# Altium PCB Hauptplatine.PcbDoc (part 1 of 3)
Units mm, origin at the board's own origin, x right, y up, seen from the top; angles counter-clockwise.
Board outline 110.5 x 110.5 mm, 4 copper layers (Top Layer, GND, POWER, Bottom Layer), stack 0.551 mm thick; 103 components, 92 nets, 407 pads, 378 vias.
Unrouted connection lines stored in the file: 3.
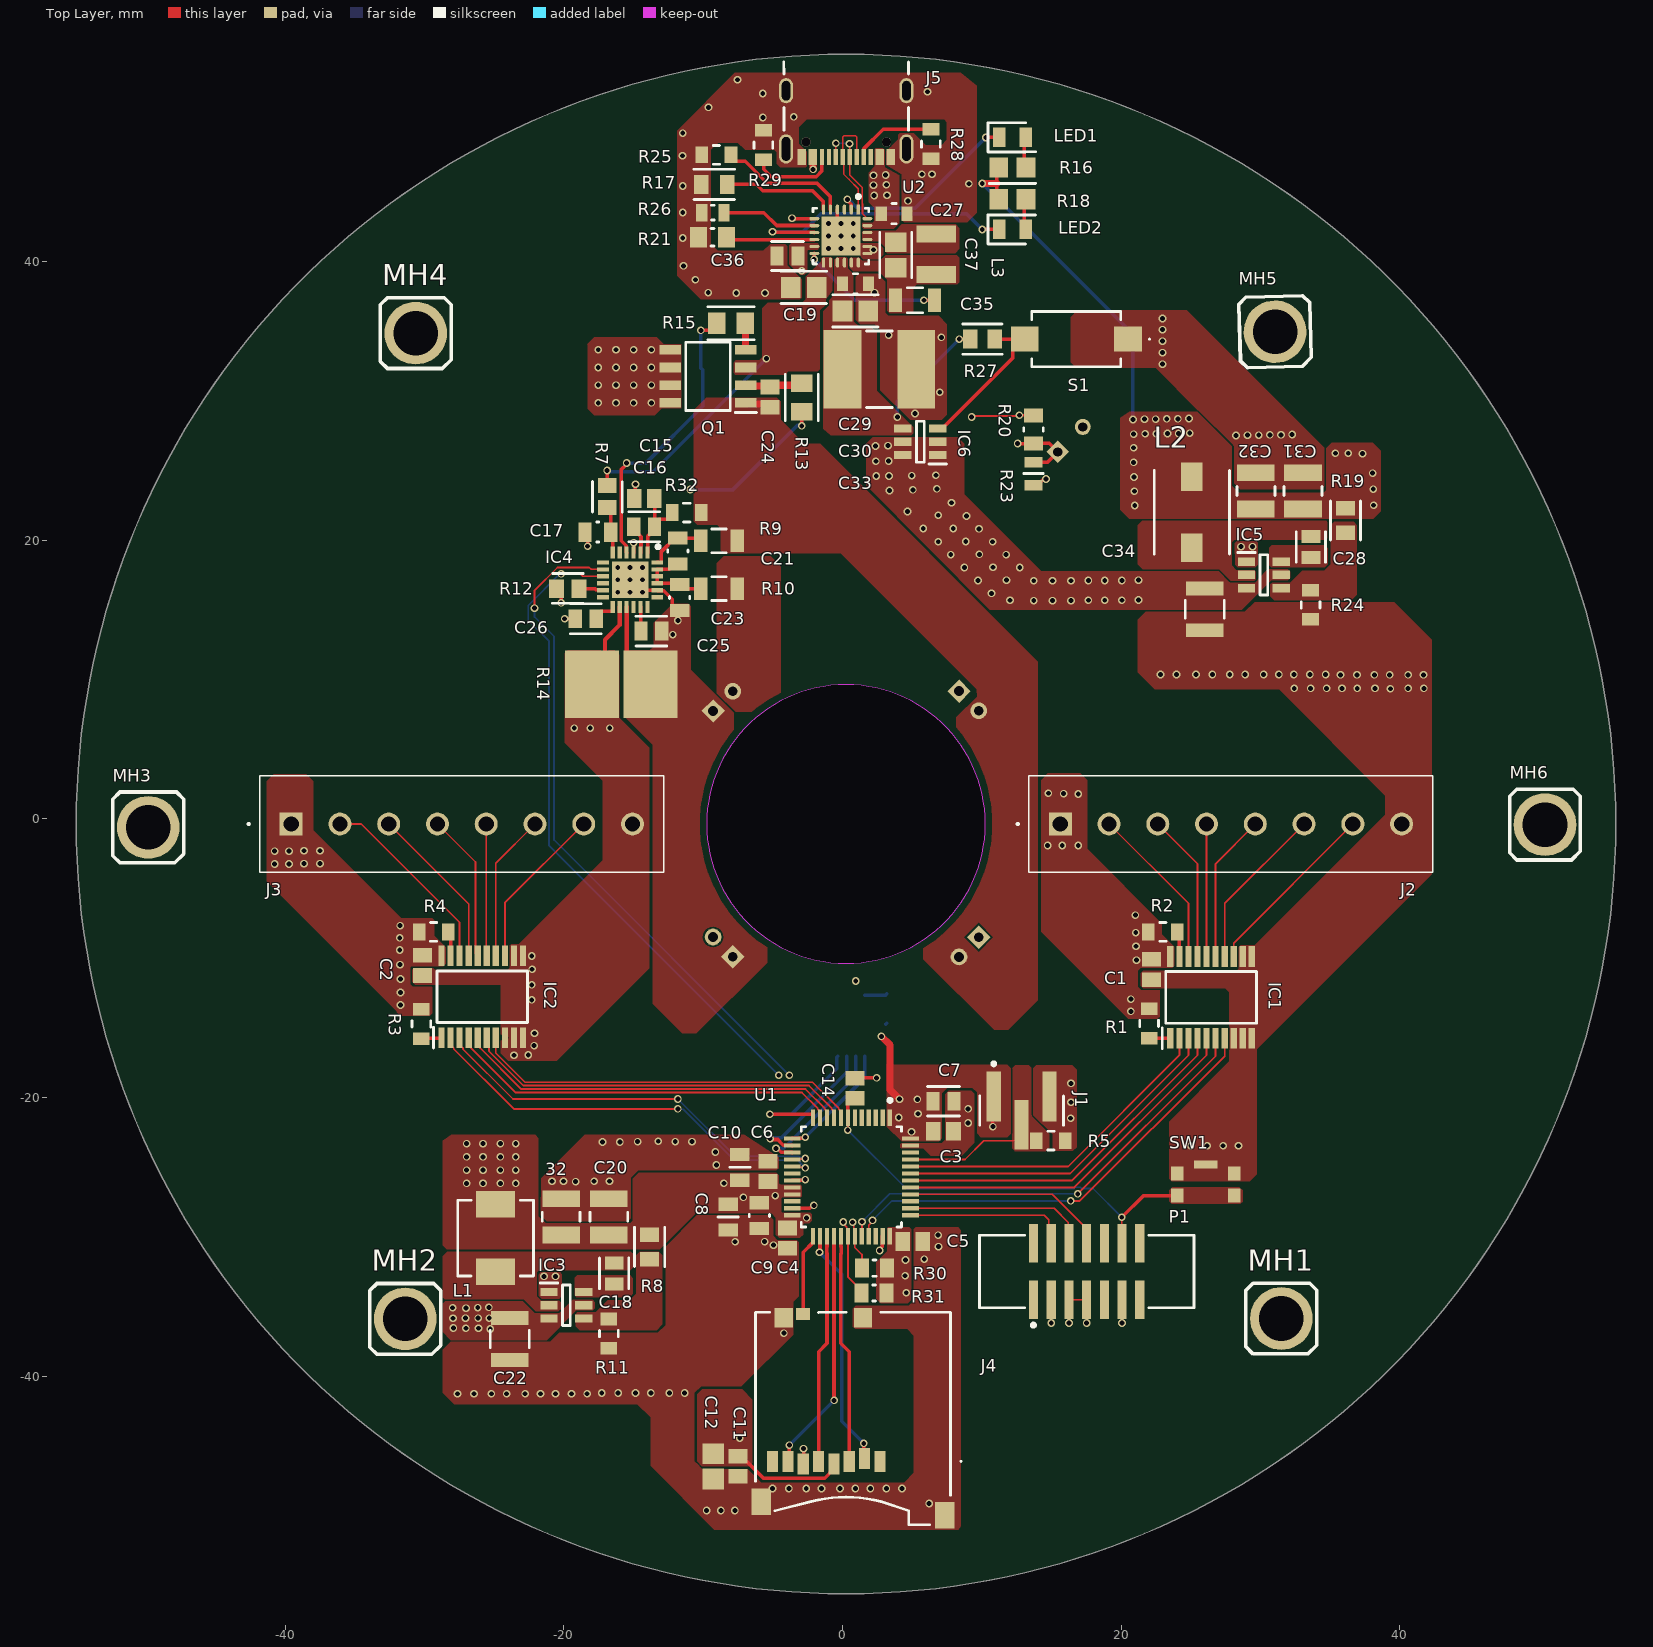
[diagram p0: Top Layer view]
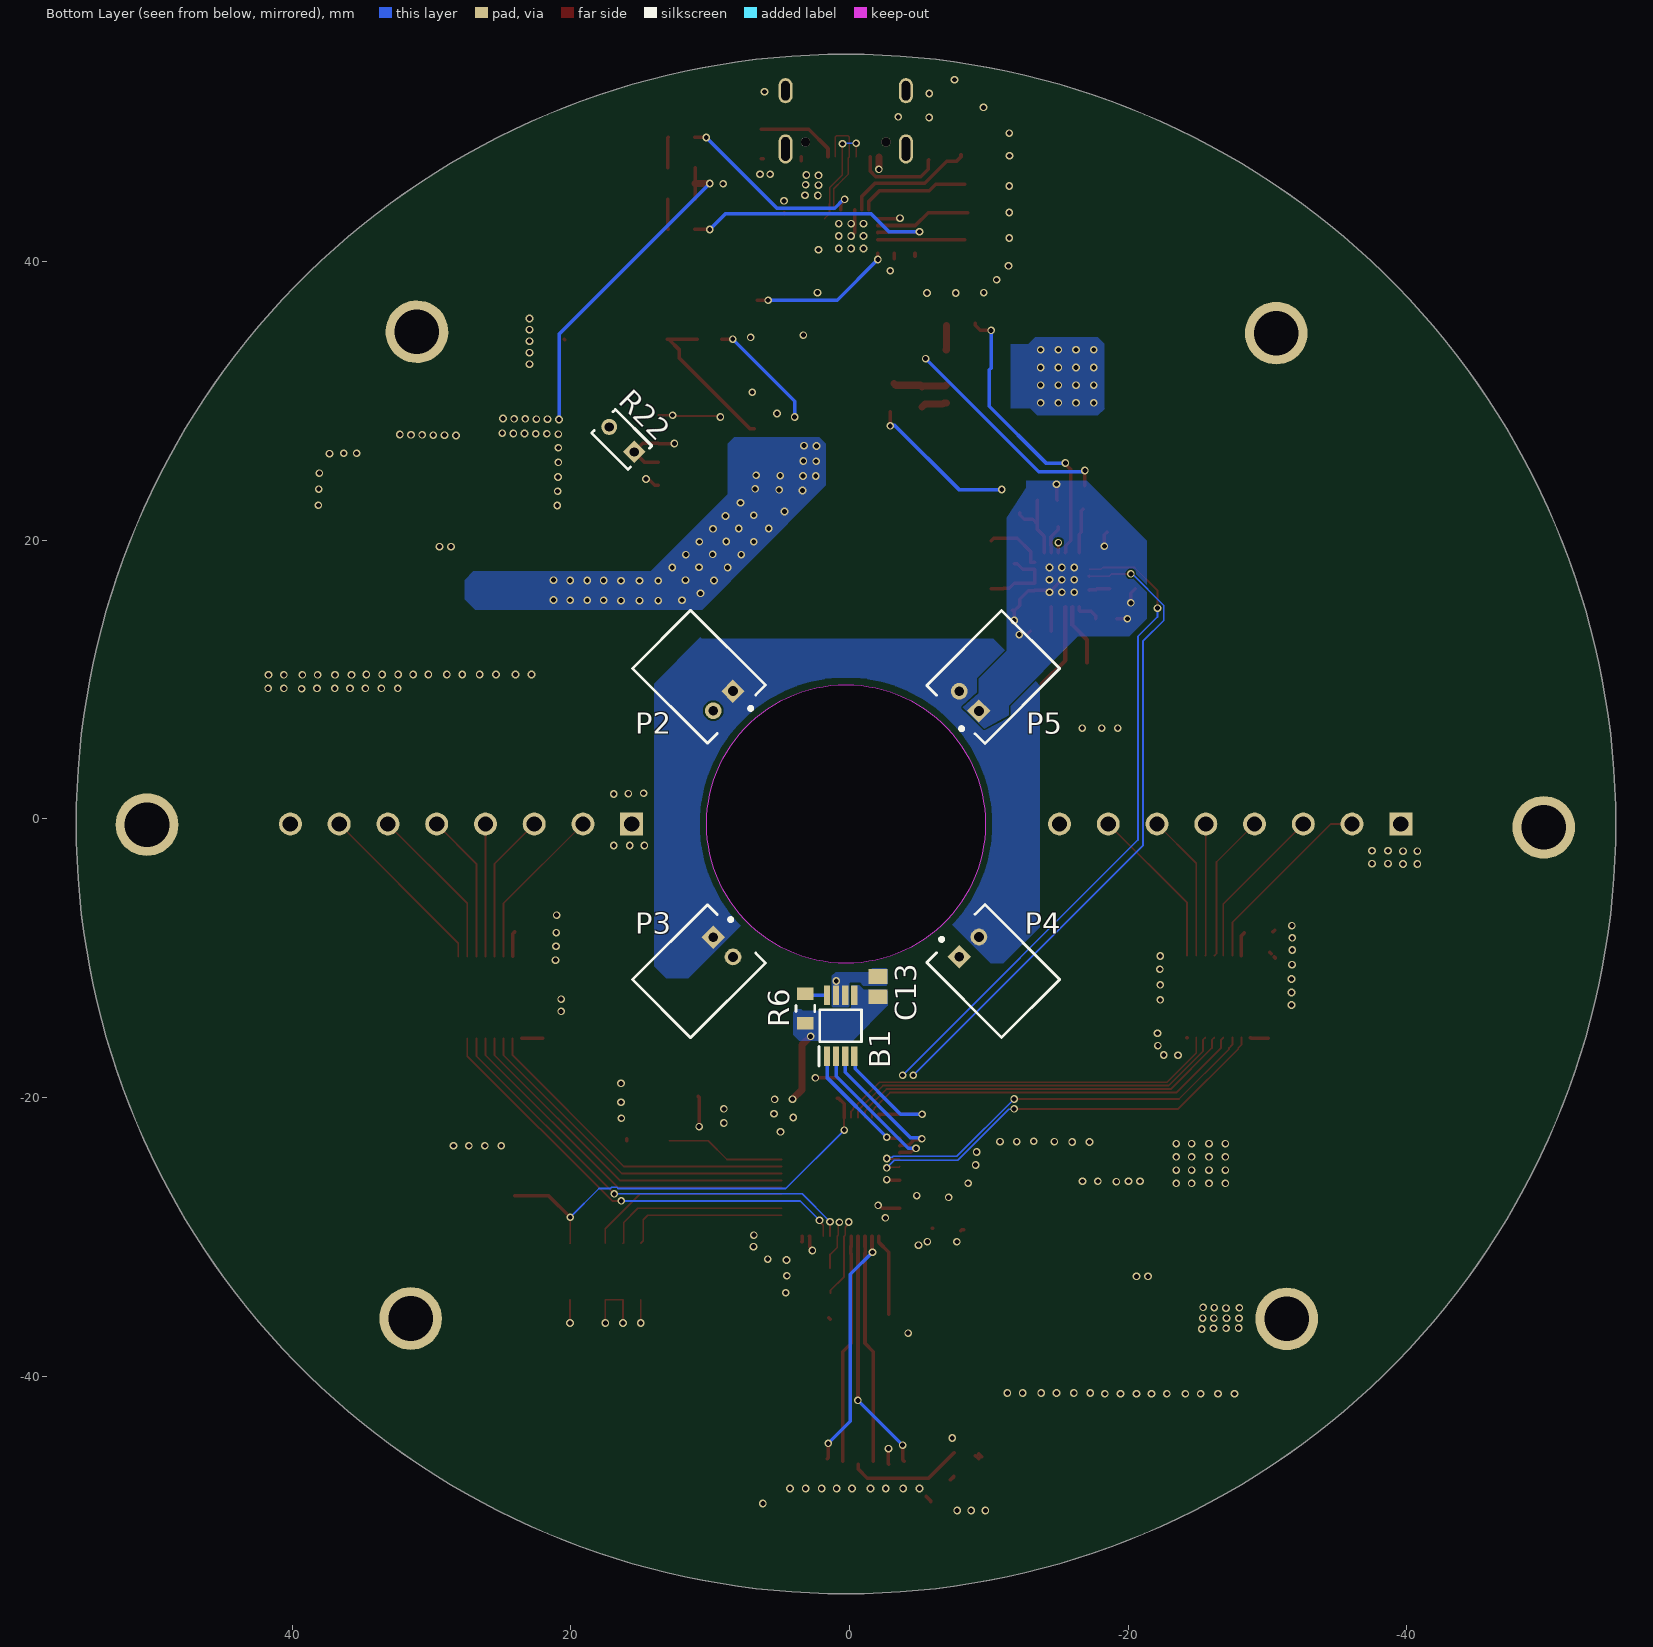
[diagram p1: Bottom Layer view, seen from below]
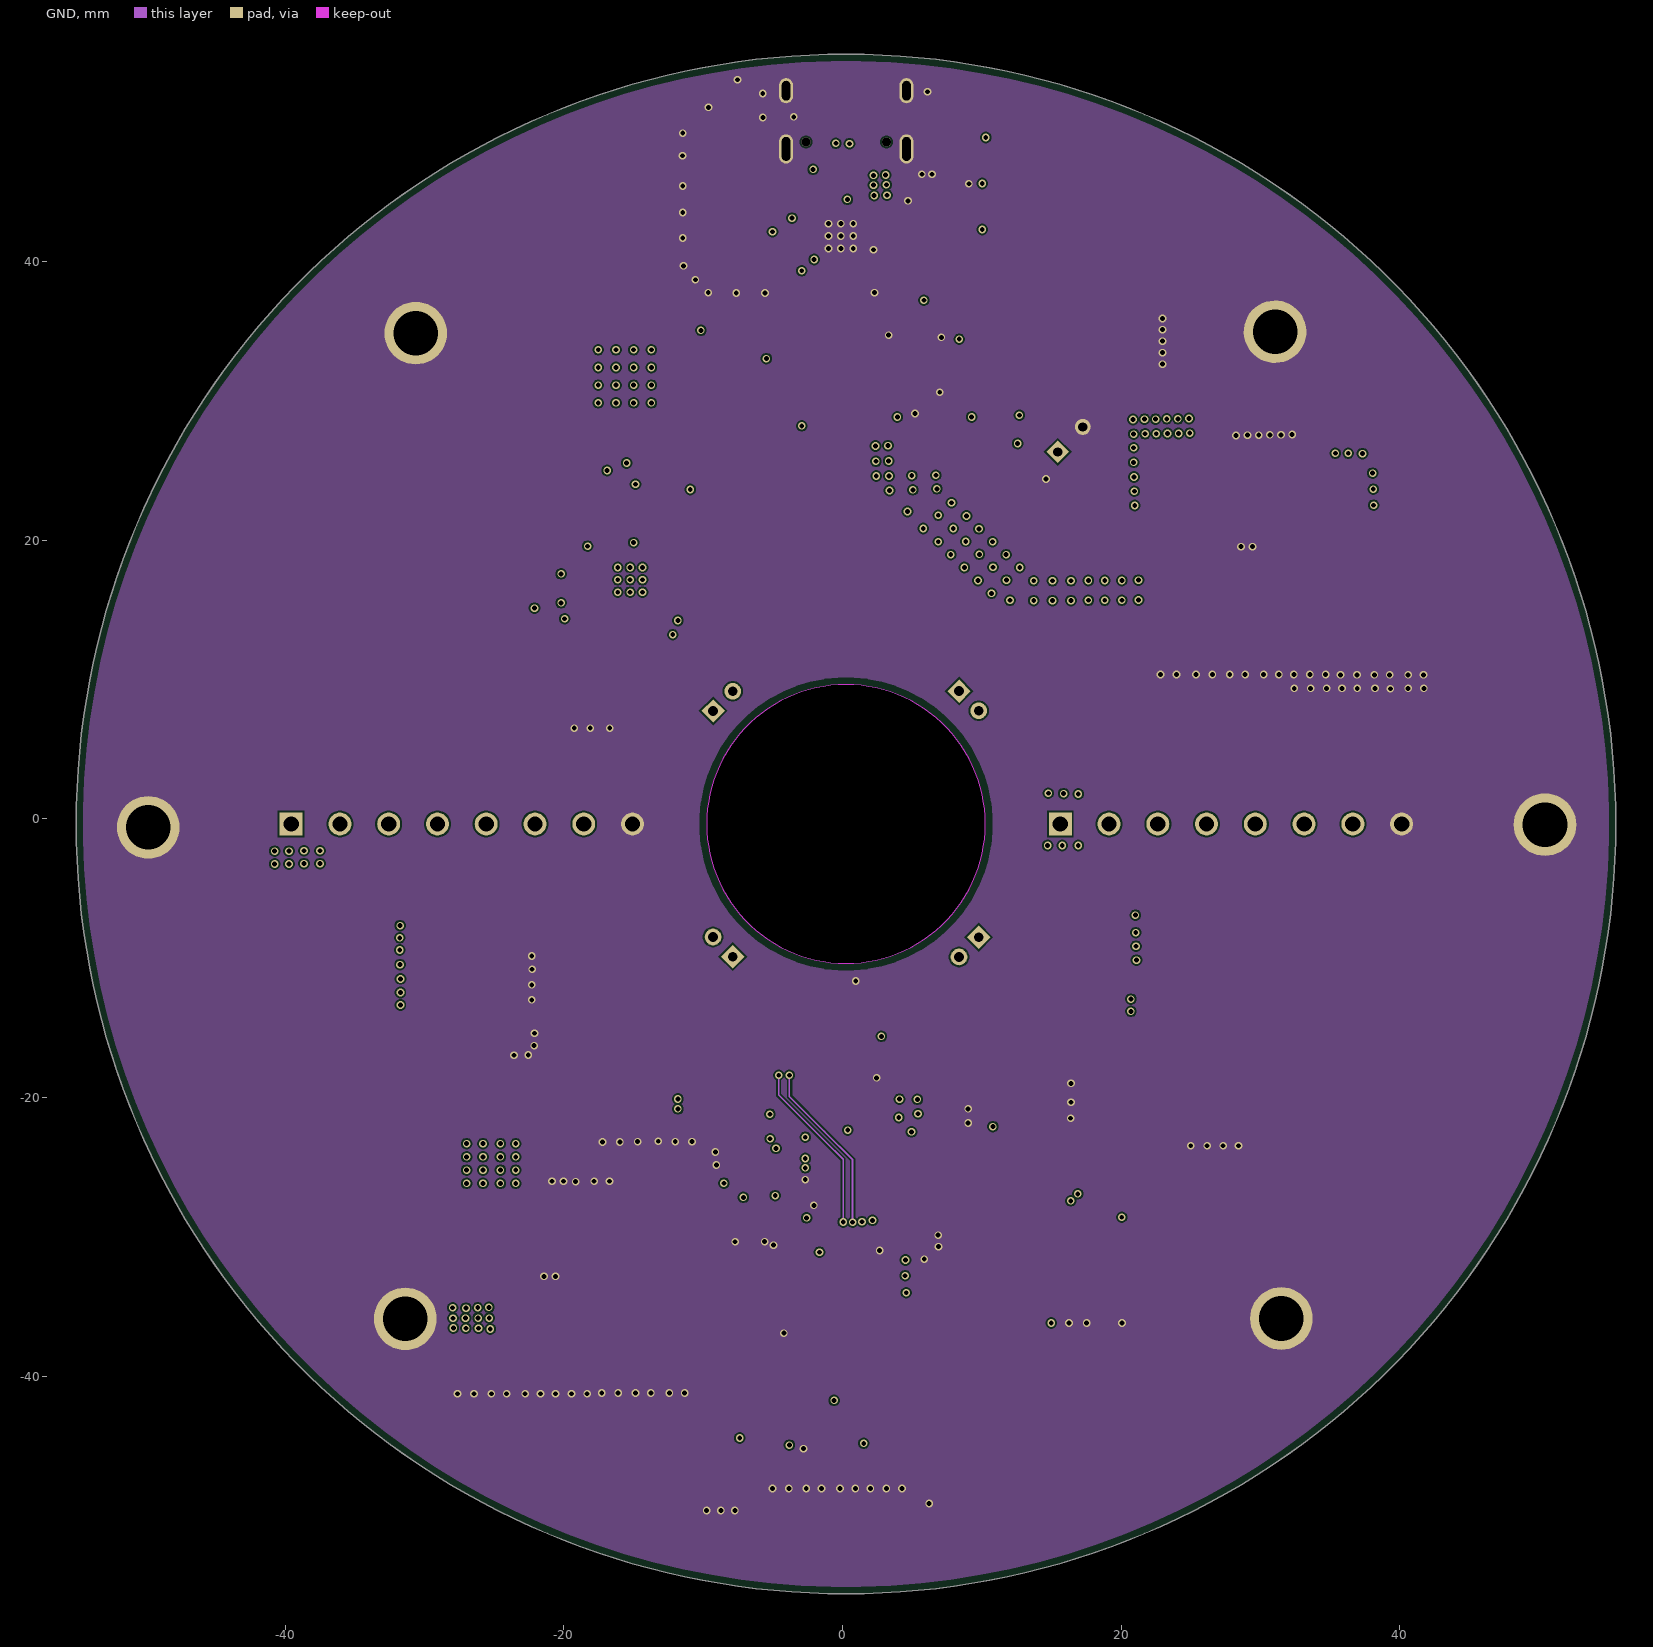
[diagram p2: GND]
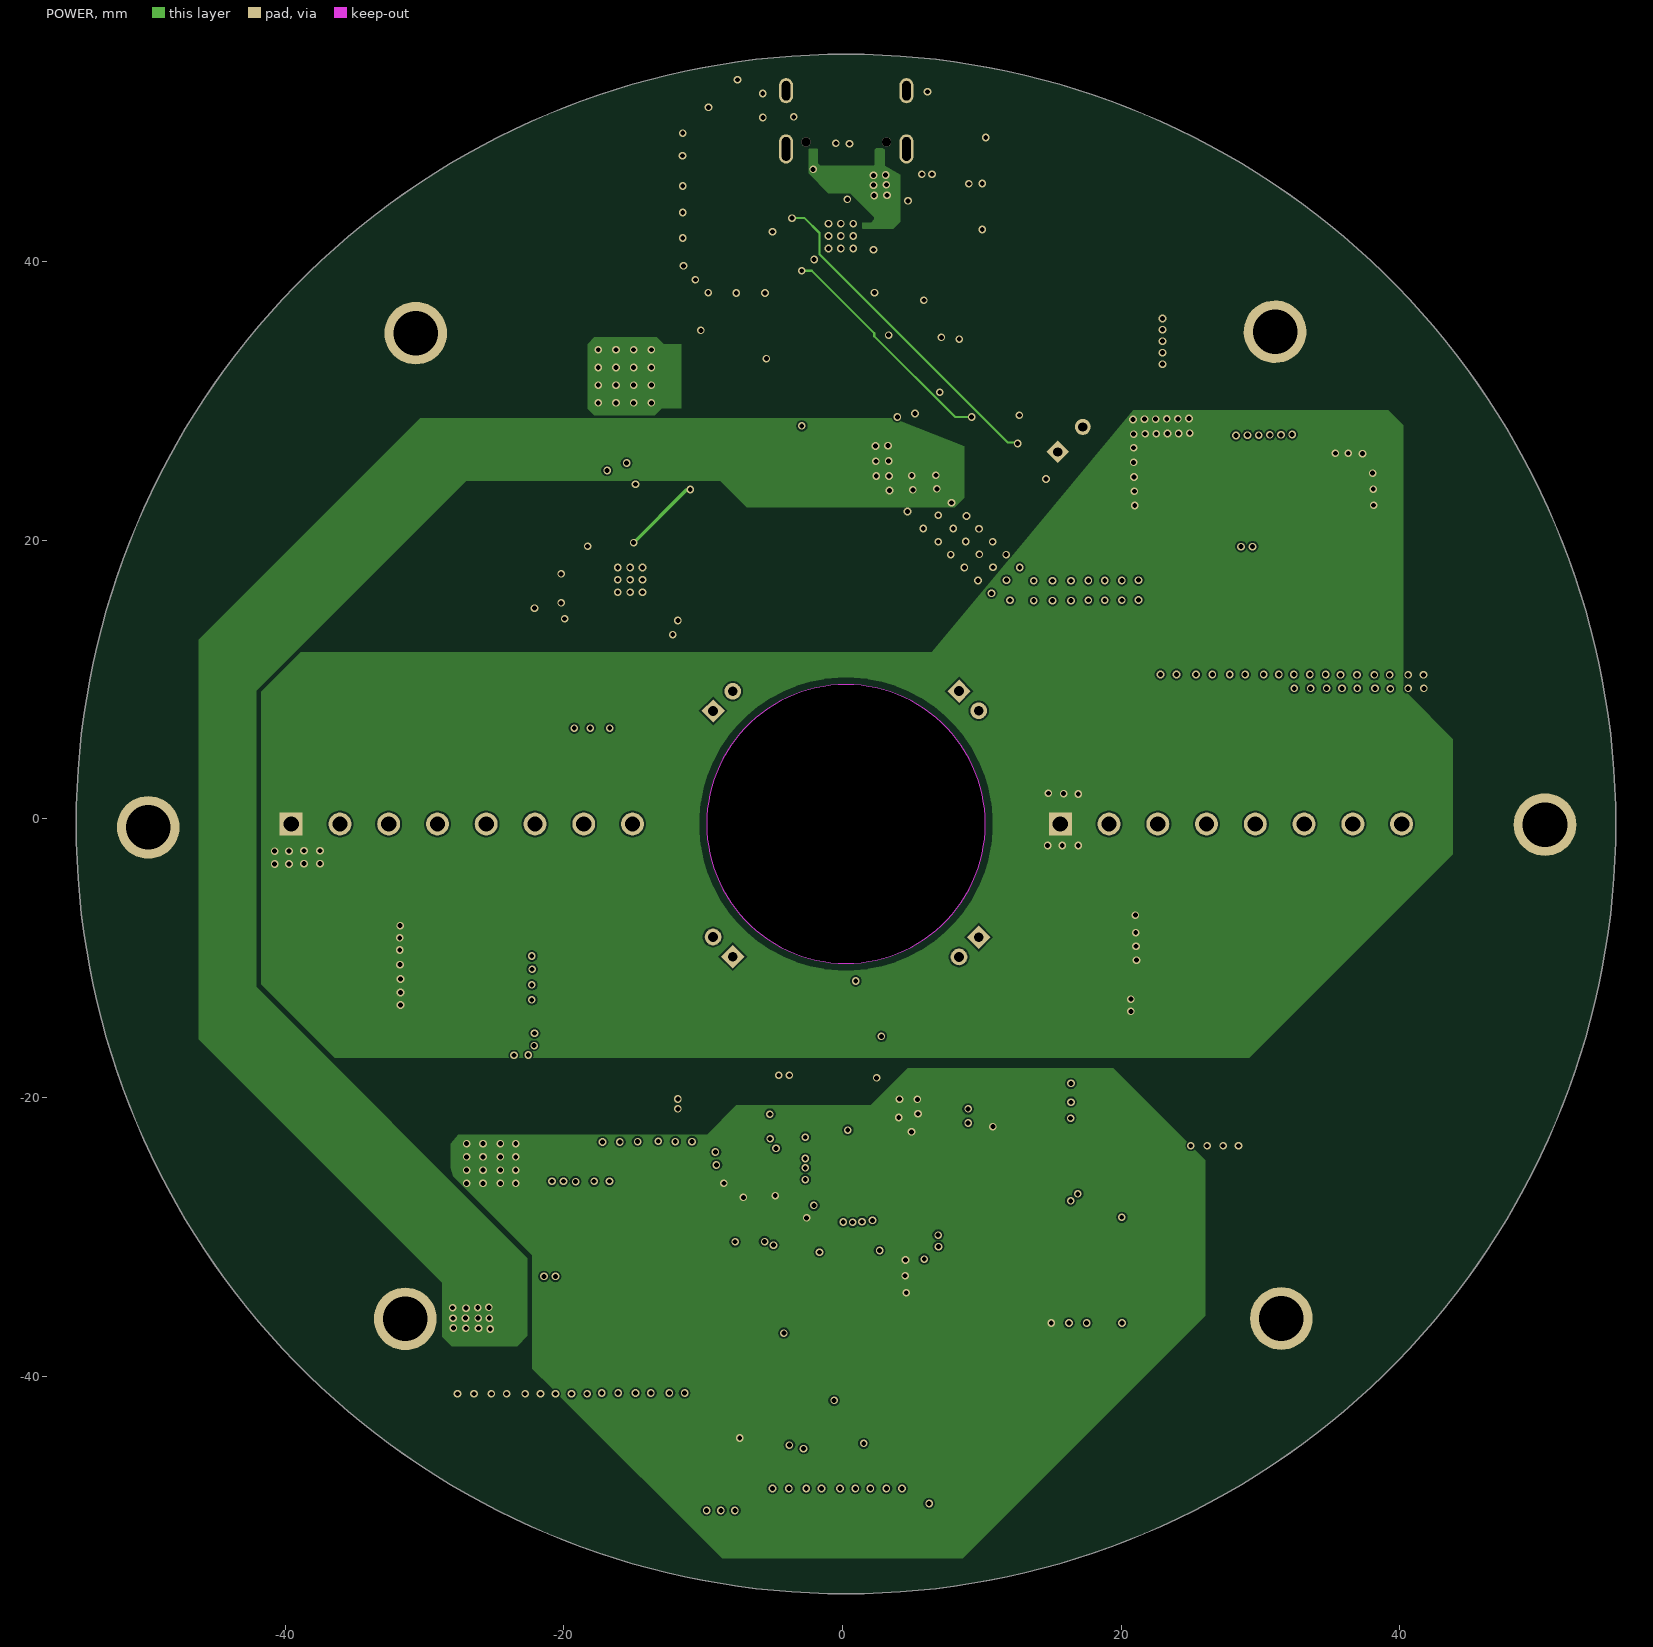
[diagram p3: POWER]
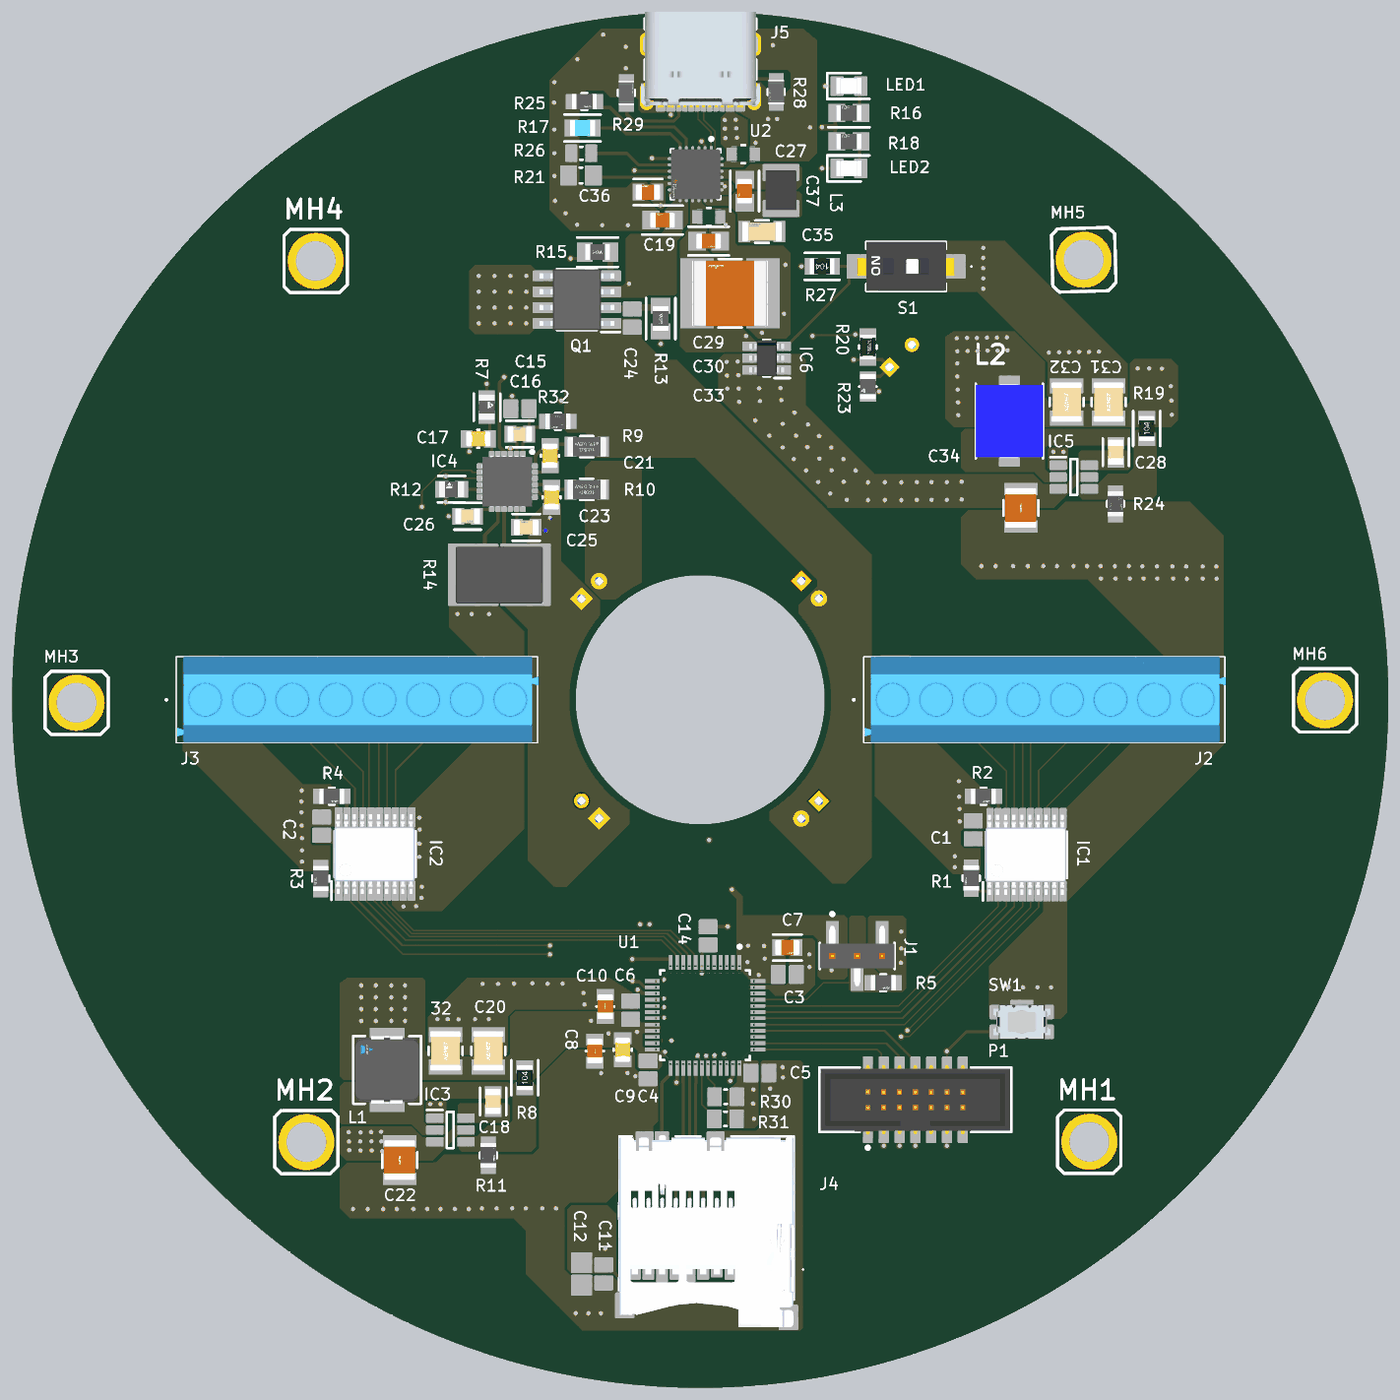
[diagram p5: 3D render of the assembled board from above, using the file's embedded part models]
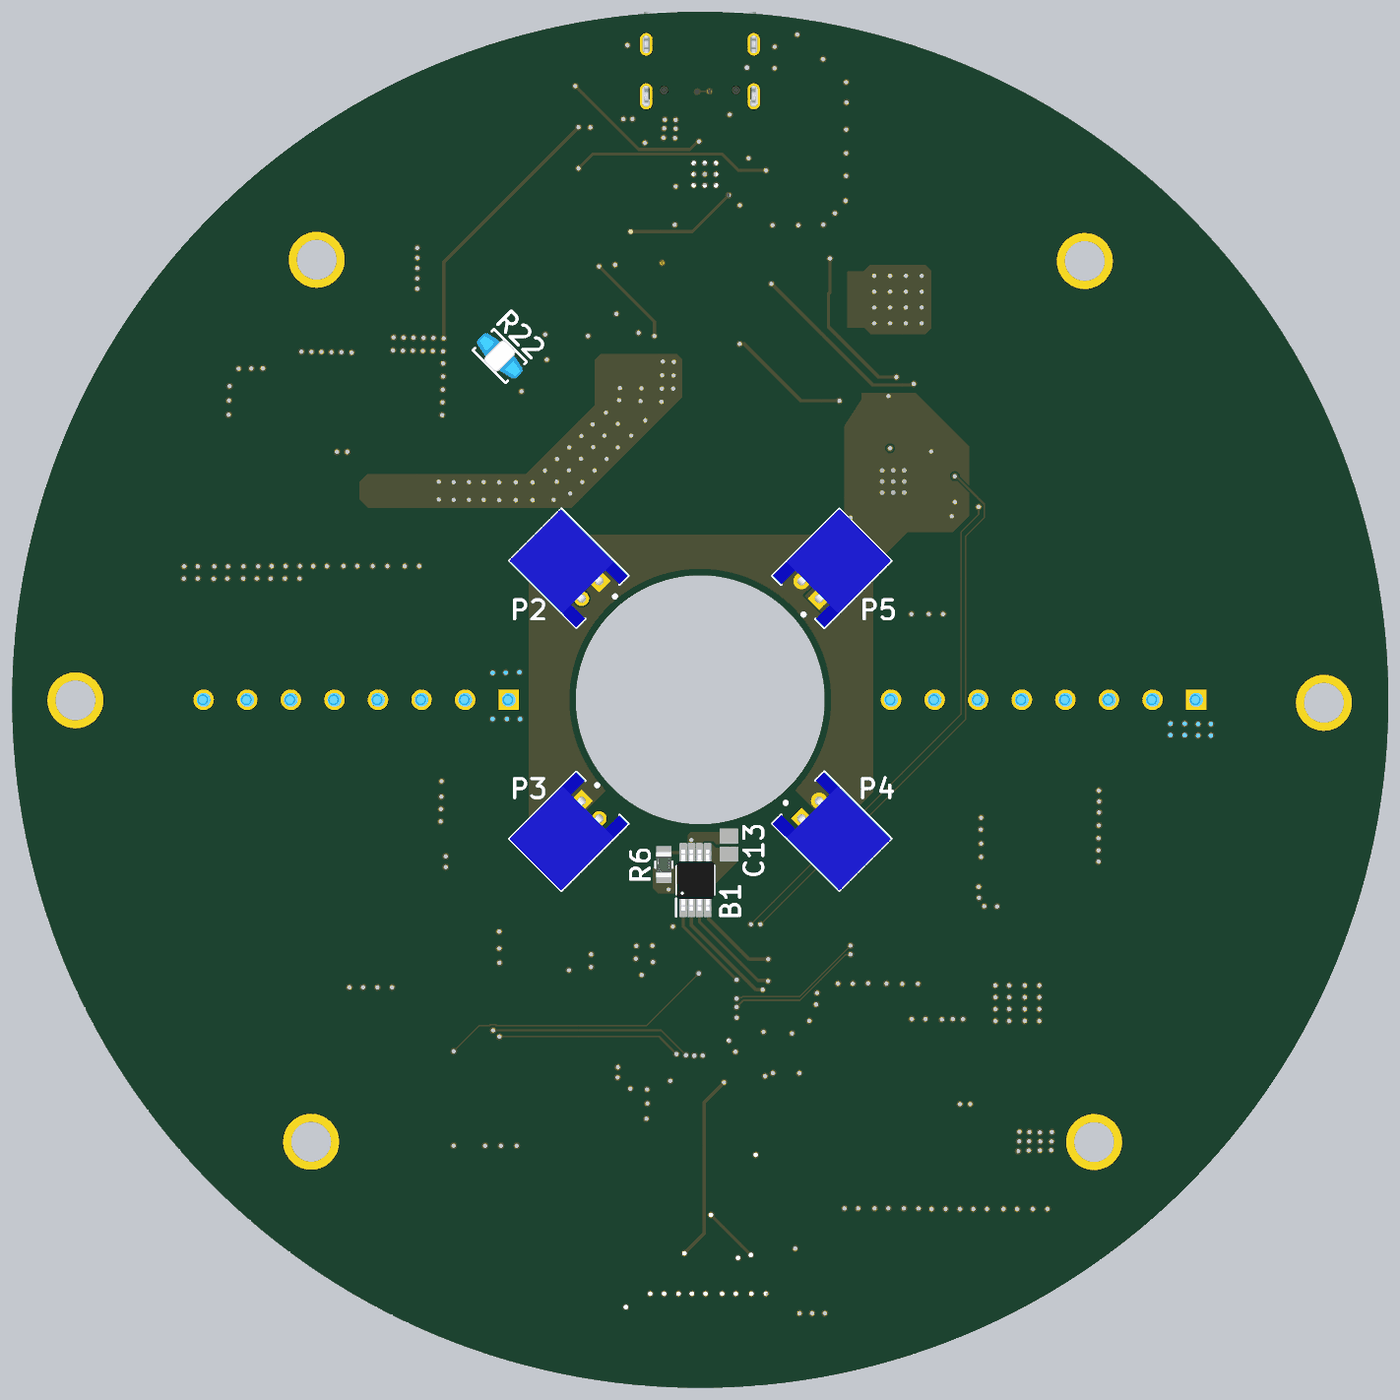
[diagram p6: 3D render of the assembled board from below, using the file's embedded part models]

## Layer stack, top to bottom
Top Solder: solder mask 0.0102, Solder Resist, Dk 3.5
Top Layer: signal copper 0.0356
Dielectric 2: prepreg 0.0711, PP-006, Dk 4.1
GND: signal copper 0.009
Dielectric 1: dielectric 0.32, FR-4, Dk 4.8
POWER: signal copper 0.009
Dielectric 3: prepreg 0.0711, PP-006, Dk 4.1
Bottom Layer: signal copper 0.0356
Bottom Solder: solder mask 0.0102, Solder Resist, Dk 3.5

## Board outline
-54.998,-0.381 ccw(c0.254,-0.381) 0.254,-55.633 ccw(c0.254,-0.381) 55.506,-0.381 ccw(c0.254,-0.381) 0.254,54.871 ccw(c0.254,-0.381)
cut-out: -9.746,-0.381 ccw(c0.254,-0.381) 0.254,-10.381 ccw(c0.254,-0.381) 10.254,-0.381 ccw(c0.254,-0.381) 0.254,9.619 ccw(c0.254,-0.381)

## Design rules (kind name [scope] priority, off if disabled: settings)
BoardOutlineClearance [All] p1: gap=0.254 ignorepadtopadclearanceinfootprint=FALSE except(0: Arc-SplitContinuation Track-SplitContinuation SMDPad-SplitContinuation THPad-SplitContinuation Via-SplitContinuation Fill-SplitContinuation Poly-SplitContinuation Region-SplitContinuation Text-SplitContinuation; 0.5: Poly-OutlineEdge Poly-CavityEdge Poly-CutoutEdge Poly-SplitBarrior)
Clearance [All] p1: gap=0.125 ignorepadtopadclearanceinfootprint=FALSE
DiffPairsRouting [All] p1: maxlimit=0.5 minlimit=0.155 mostfreqgap=0.5 toplayer_maxgap=0.155 toplayer_prefgap=0.155 toplayer_minwidth=0.11 toplayer_maxwidth=0.11 toplayer_prefwidth=0.11 midlayer1_mingap=0.5 midlayer1_minwidth=0.111 midlayer1_maxwidth=0.111 midlayer1_prefwidth=0.111 midlayer2_mingap=0.5 midlayer2_minwidth=0.111 midlayer2_maxwidth=0.111 midlayer2_prefwidth=0.111 bottomlayer_maxgap=0.155 bottomlayer_prefgap=0.155 bottomlayer_minwidth=0.11 bottomlayer_maxwidth=0.11 bottomlayer_prefwidth=0.11 impedanceprofiledriven=TRUE impedanceprofileid={55AF432C-153F-44E8-B56E-C51BD64A68D3} impedanceprofilevalue=90.000000 maxuncoupledlength=12.7
HoleSize HoleSizeVia [IsVia] p1: absolutevalues=TRUE maxlimit=0.45 minlimit=0.25 maxpercent=80.000 minpercent=20.000
HoleSize HoleSizePTH [IsPad] p2: absolutevalues=TRUE maxlimit=5.6 minlimit=0.5 maxpercent=80.000 minpercent=20.000
HoleToHoleClearance [All] p1: gap=0.3 allowstackedmicrovias=TRUE
MinimumAnnularRing MinimumAnnularRingVias [All] p1: minimumring=0.1
MinimumAnnularRing MinimumAnnularRingGeneral [All] p2: minimumring=0.3
MinimumSolderMaskSliver [All] p1: minsoldermaskwidth=0.08
PasteMaskExpansion [All] p1: expansion=0.085
PolygonConnect [All] p1: connectstyle=Direct reliefconductorwidth=0.254 reliefentries=4 polygonreliefangle="90 Angle" airgapwidth=0.254
RoutingVias [All] p1: holewidth=0.35 width=0.55 viastyle="Through Hole" minholewidth=0.3 minwidth=0.5 maxholewidth=0.45 maxwidth=0.65
SilkToSilkClearance SilkToSilkClerance [All] p1: silktosilkclearance=0.125
SilkToSolderMaskClearance [IsPad] p1: minsilkscreentomaskgap=0.125 clearancetoexposedcopper=TRUE
SolderMaskExpansion SolderMaskExpansionVia [IsVia] p1: expansion=0.1 istentingtop=TRUE useseparateexpansions=TRUE expansionbottom=0.1 istentingbottom=TRUE
SolderMaskExpansion [All] p2: expansion=0.05 istentingtop=FALSE
SupplyNets "Schematic Supply Nets_11" [InNet('3V3')] p1: voltage=0.000
SupplyNets "Schematic Supply Nets_10" [InNet('VBUS')] p2: voltage=0.000
SupplyNets "Schematic Supply Nets_9" [InNet('5V')] p3: voltage=0.000
SupplyNets "Schematic Supply Nets_8" [InNet('VBAT')] p4: voltage=0.000
SupplyNets "Schematic Supply Nets_7" [InNet('VMID')] p5: voltage=0.000
SupplyNets "Schematic Supply Nets_6" [InNet('VSWITCH')] p6: voltage=0.000
SupplyNets "Schematic Supply Nets_5" [InNet('VBOT')] p7: voltage=0.000
SupplyNets "Schematic Supply Nets_4" [InNet('VTOP')] p8: voltage=0.000
SupplyNets "Schematic Supply Nets_3" [InNet('VSYS')] p9: voltage=0.000
SupplyNets "Schematic Supply Nets_1" [InNet('GND')] p10: voltage=0.000
UnRoutedNet [All] p1: checkbadconnections=TRUE
Width [All] p1: maxlimit=2.54 minlimit=0.125 preferedwidth=0.254
22 further rules are at their usual default settings.

## Classes and differential pairs
component class Microcontroller: B1 C1 C2 C3 C4 C5 C6 C7 C8 C9 C10 C11 C12 C13 C14 IC1 IC2 J1 J2 J3 J4 MH1 MH2 MH3 MH4 MH5 MH6 P1 R1 R2 R3 R4 R5 R6 SW1 U1
component class Battery-Management: 32 C15 C16 C17 C18 C19 C20 C21 C22 C23 C24 C25 C26 C27 C28 C29 C30 C31 C32 C33 C34 C35 C36 C37 IC3 IC4 IC5 IC6 L1 L2 L3 LED1 LED2 P2 P3 P4 P5 Q1 R7 R8 R9 R10 R11 R12 R13 R14 R15 R16 R17 R18 R19 R20 R21 R22 R23 R24 R25 R26 R27 R28 R29 R30 R31 R32 S1
differential pair D: +D_P -D_N

## Components (designator, comment, footprint, x,y, rotation, side; value= is the part's Value field where it differs from the comment)
32 "22uF" FP-C1210C226K4RACTU-MFG -20.193,-28.575 r90 top
B1 "TMAG5170A2EDGKRQ1" SOP65P490X110-8N 0.639,-14.859 r90 bottom
C1 "100nF" CAPC2013X145X50LL20T20 22.175,-10.825 r90 top
C2 "100nF" CAPC2013X145X50LL20T20 -30.15,-10.525 r90 top
C3 "100nF" CAPC2013X145X50LL20T20 7.246,-22.435 r180 top
C4 "100nF" CAPC2013X145X50LL20T20 -3.937,-30.099 r90 top
C5 "100nF" CAPC2013X145X50LL20T20 5.043,-30.353 r180 top
C6 "100nF" CAPC2013X145X50LL20T20 -5.334,-25.31 r270 top
C7 "4.7uF" FP-C0805C475K3RACAUTO-MFG 7.251,-20.279 r0 top
C8 "1uF" FP-CC0805-EB-MFG -8.212,-28.59 r270 top
C9 "10nF" FP-AC0805-0_85-MFG -5.969,-28.484 r270 top value="10 nF"
C10 "1uF" FP-CC0805-EB-MFG -7.366,-25.019 r90 top
C11 "100nF" CAPC2013X145X50LL20T20 -7.493,-46.482 r270 top
C12 "10uF" CAPC2013X140X50ML20T25 -9.271,-46.482 r90 top
C13 "100nF" CAPC2013X145X50LL20T20 -2.05,-12.05 r270 bottom
C14 "100nF" CAPC2013X145X50LL20T20 0.889,-19.341 r270 top
C15 "470nF" FP-C0805C-DN-MFG -14.236,20.955 r0 top value="0.47 μF"
C16 "100nF" CAPC2013X145X50LL20T20 -14.224,22.987 r0 top
C17 "10nF" FP-AC0805-0_85-MFG -17.562,20.574 r180 top value="10 nF"
C18 "100nF" FP-C0805C104M5UACTU-MFG -16.383,-32.639 r90 top
C19 "10uF" FP-GRM21B-0_15-IPC_A -2.78,38.135 r180 top
C20 "22uF" FP-C1210C226K4RACTU-MFG -16.764,-28.575 r90 top
C21 "10nF" FP-AC0805-0_85-MFG -11.811,19.213 r270 top value="10 nF"
C22 "2.2uF" FP-CC1210-G3-MFG -23.876,-37.338 r270 top
C23 "10nF" FP-AC0805-0_85-MFG -11.684,15.875 r270 top value="10 nF"
C24 "100nF" CAPC2013X145X50LL20T20 -5.207,30.263 r270 top
C25 "470nF" FP-C0805C-DN-MFG -13.716,13.462 r0 top value="0.47 μF"
C26 "470nF" FP-C0805C-DN-MFG -18.427,14.351 r180 top value="0.47 μF"
C27 "1uF" FP-CGA4J-MFG 3.712,43.427 r0 top
C28 "100nf" FP-C0805C104M5UACTU-MFG 33.625,19.5 r90 top
C29 "1uF" FP-CGA4J-MFG 0.939,38.389 r0 top
C30 "10uF" FP-GRM21B-0_15-IPC_A 0.926,36.449 r0 top
C31 "22uF" FP-C1210C226K4RACTU-MFG 33.05,23.525 r90 top
C32 "22uF" FP-C1210C226K4RACTU-MFG 29.675,23.525 r90 top
C33 "33uF" FP-KRM55Q-6_1_5_3_3_9_1_2-MFG 2.65,32.258 r180 top
C34 "2.2uF" FP-CC1210-G3-MFG 26,15.025 r270 top
C35 "47nF" FP-C1206C-EB-MFG 5.21,37.211 r0 top value="47,000 pF"
C36 "4.7uF" FP-C0805C475K3RACAUTO-MFG -3.949,40.386 r180 top
C37 "10uF" FP-GRM21B-0_15-IPC_A 3.824,40.458 r270 top
IC1 "74AHCT245APWJ" SOP65P640X110-20N 26.457,-12.827 r90 top
IC2 "74AHCT245APWJ" SOP65P640X110-20N -25.853,-12.774 r90 top
IC3 "LMR51430XFDDCR" SOT95P280X110-6N -19.812,-34.925 r0 top
IC4 "MAX17320G20+" QFN50P400X400X80-25N -15.24,17.145 r270 top
IC5 "LMR51430XFDDCR" SOT95P280X110-6N 30.25,17.5 r0 top
IC6 "FDC608PZ" SOT95P275X110-6N 5.588,27.051 r180 top
J1 "TMM-103-01-L-S-SM" FP-TMM-103-01-L-S-SM-MFG 12.859,-20.954 r0 top
J2 "TB0011-350-08BE" TB0011-350-08BE 15.632,-0.381 r180 top
J3 "TB0011-350-08BE" TB0011-350-08BE -39.568,-0.381 r180 top
J4 "MSD-5-A" MSD5A 0.762,-43.053 r180 top
J5 "629722000214" LIBRARYSOURCE=Vault 0.274,51.103 r180 top
L1 "2.2uH" FP-IHLP-2020BZ-FP_1_905x2-MFG -24.892,-30.099 r90 top
L2 "3.3uH" INDPM6054X300N 25.075,22 r90 top
L3 "1uH" WE-PMFI_322512 6.731,40.513 r90 top
LED1 "LG_R971-KN-1" LEDC2012X80N 12.192,48.895 r0 top
LED2 "LG_R971-KN-1" LEDC2012X80N 12.192,42.291 r0 top
MH1 "MountingHole" MTH 31.5,-35.875 r0 top
MH2 "MountingHole" MTH -31.375,-35.9 r0 top
MH3 "MountingHole" MTH -49.825,-0.625 r0 top
MH4 "MountingHole" MTH -30.625,34.85 r0 top
MH5 "MountingHole" MTH 31.05,34.95 r1.6 top
MH6 "MountingHole" MTH 50.425,-0.425 r0 top
P1 "62701420621" 62701420621 17.526,-32.5 r0 top
P2 "S2B-PH-K-S(LF)(SN)" JST-S2B-PH-K-S_V 10.804,10.187 r315 bottom
P3 "S2B-PH-K-S(LF)(SN)" JST-S2B-PH-K-S_V 10.804,-10.949 r225 bottom
P4 "S2B-PH-K-S(LF)(SN)" JST-S2B-PH-K-S_V -10.314,-10.931 r135 bottom
P5 "S2B-PH-K-S(LF)(SN)" JST-S2B-PH-K-S_V -10.314,10.169 r45 bottom
Q1 "IRF7313TRPBFXTMA1" SOIC127P600X175-8N -9.652,31.75 r180 top
R1 "10K" FP-AT0805-MFG 22.012,-14.698 r270 top
R2 "10K" FP-AT0805-MFG 22.994,-8.128 r0 top
R3 "10K" FP-AT0805-MFG -30.226,-14.732 r270 top
R4 "10K" FP-AT0805-MFG -29.337,-8.128 r0 top
R5 "10k" FP-AT0805-MFG 14.952,-23.114 r0 top
R6 "4K7" FP-RT0805-MFG 3.175,-13.623 r90 bottom value=47KΩ
R7 "1K" FP-PCAN0805-MFG -16.891,23.114 r90 top value=1kΩ
R8 "100k" FP-RQ73C2A-IPC_B -13.843,-30.734 r90 top
R9 "47R" FP-CRGP1206-IPC_C -8.859,19.939 r180 top value=47Ω
R10 "47R" FP-CRGP1206-IPC_C -8.859,16.51 r180 top value=47Ω
R11 "22k1" FP-RT0805-MFG -16.764,-36.957 r270 top value=22.1KΩ
R12 "1K" FP-PCAN0805-MFG -19.717,16.51 r180 top value=1kΩ
R13 "100R" FP-RN73R2A-IPC_A -2.921,30.226 r90 top
R14 "0R005" RESC7146X175N -15.875,9.65 r180 top
R15 "100R" FP-RN73R2A-IPC_A -7.992,35.56 r0 top
R16 "560R" FP-RMCF0805-IPC_A 12.192,46.736 r180 top
R17 "150K" FP-RK73H2A-IPC_B -9.2,45.525 r0 top
R18 "560R" FP-RMCF0805-IPC_A 12.192,44.45 r180 top
R19 "100k" FP-RQ73C2A-IPC_B 36.1,21.4 r90 top
R20 "5K23" FP-RP73P-2A-MFG 13.716,27.94 r270 top value=5.23KΩ
R21 "5K76" RESC2013X60X35ML10T20 -9.325,41.725 r180 top
R22 "103AT-2" FP-103AT-2-MFG 16.35,27.225 r45 bottom
R23 "30K1" FP-MCU0805-IPC_C 13.716,24.765 r270 top
R24 "13k7" FP-RT0805-MFG 33.6,15.35 r270 top value=13.7KΩ
R25 "10K" FP-AT0805-MFG -9.05,47.65 r0 top
R26 "383R" RESC2013X60X35LL10T20 -9.3,43.5 r0 top
R27 "100k" FP-RQ73C2A-IPC_B 10.045,34.417 r180 top
R28 "5K1" FP-AC0805-MFG 6.35,48.421 r270 top value=5.1KΩ
R29 "5K1" FP-AC0805-MFG -5.675,48.35 r90 top value=5.1KΩ
R30 "4K7" RESC2013X60X35NL10T20 2.297,-32.258 r0 top
R31 "4K7" RESC2013X60X35NL10T20 2.275,-34.036 r0 top
R32 "10" FP-RT0805-MFG -11.176,21.971 r180 top value=10Ω
S1 "CFS-0102TA" CFS0102TA 16.781,34.417 r90 top
SW1 "435441019830" 435441019830 26.075,-26.25 r0 top
U1 "STM32G431CBT6" FP-LQFP48-5B-MFG 0.639,-25.713 r270 top
U2 "BQ25886RGER" FP-RGE0024H-IPC_C -0.113,41.818 r270 top

## Footprints (in the part's own frame and the unit in brackets; to place one, negate y for a bottom-side part, rotate by r counter-clockwise, add the part's x,y. Pads: shape width x height; smd on the part's side, far side on the other; paste and mask are expansions set on the pad)
62701420621 [mm] "Boc Header SMT type, 14p"
  rect 0.65x2.76 smd: 1(-3.81,-2.02) 2(-3.81,2.02) 3(-2.54,-2.02) 4(-2.54,2.02) 5(-1.27,-2.02) 6(-1.27,2.02) 7(0,-2.02) 8(0,2.02) 9(1.27,-2.02) 10(1.27,2.02) 11(2.54,-2.02) 12(2.54,2.02) 13(3.81,-2.02) 14(3.81,2.02)
  silkscreen extent -7.7,-3.97 7.7,2.6, body extent -7.62,-2.8 7.62,2.8, height 5.2
435441019830 [mm] "Tact Switch, SMT, body 4.1x2.8mm"
  rect 0.9x1 smd: A1(-2.05,0.8) A2(2.05,0.8) B1(-2.05,-0.8) B2(2.05,-0.8)
  rect 1.7x0.55 smd: G1(0,1.425)
  body extent -2.3,-1.4 2.3,1.45, height 1.9
CAPC2013X140X50ML20T25 [mm] "Chip Capacitor, 2-Leads, Body 2.00x1.25mm, IPC Low Density"
  rect 1.5x1.55 smd: 1(-0.9,0) 2(0.9,0)
  body extent -1.1,-0.72 1.1,0.72, height 1.4
CAPC2013X145X50LL20T20 [mm] "Chip Capacitor, 2-Leads, Body 2.00x1.25mm, IPC High Density"
  rect 1.05x1.35 smd: 1(-0.725,0) 2(0.725,0)
  body extent -1.1,-0.72 1.1,0.72, height 1.45
CFS0102TA [mm]
  rect 1.8x2 smd: 1(0,-3.7) 2(0,3.7)
  silkscreen extent -1.97,-5.3 1.97,3.2, body extent -1.97,-3.9 1.97,3.9, height 4.5
FP-103AT-2-MFG [mm]
  rect 1.15x1.15 hole 0.65 paste-2539.97 mask+0: 1(-1.27,0)
  round 1.15 hole 0.65 paste-2539.97 mask+0: 2(1.27,0)
  silkscreen extent -1.85,-1.2 1.85,1.2, body extent -2.19,-1.2 2.19,1.2, height 9.5
FP-AC0805-0_85-MFG [mm]
  rect 0.95x1.4 smd paste+0 mask+0: 1(-0.925,0) 2(0.925,0)
  silkscreen extent -0.08,-0.72 0.08,0.72, body extent -1.6,-1.05 1.6,1.05, height 0.25
FP-AC0805-MFG [mm]
  rect 0.9x1.2 smd paste+0 mask+0: 1(-1.05,0) 2(1.05,0)
  silkscreen extent -0.23,-0.67 0.23,0.67, body extent -1.6,-0.77 1.6,0.77, height 0.25
FP-AT0805-MFG [mm]
  rect 0.9x1.2 smd paste+0 mask+0: 1(-1.05,0) 2(1.05,0)
  silkscreen extent -0.23,-0.67 0.23,0.67, body extent -1.6,-0.77 1.6,0.77, height 0.25
FP-C0805C104M5UACTU-MFG [mm]
  rect 0.95x1.35 smd paste+0 mask+0: 1(-0.75,0) 2(0.75,0)
  silkscreen extent -1.1,-1.05 1.1,1.05, body extent -1.4,-0.85 1.4,0.85, height 0.25
FP-C0805C475K3RACAUTO-MFG [mm]
  rect 0.95x1.35 smd paste+0 mask+0: 1(-0.75,0) 2(0.75,0)
  silkscreen extent -1.15,-1.05 1.15,1.05, body extent -1.4,-0.85 1.4,0.85, height 0.25
FP-C0805C-DN-MFG [mm]
  rect 0.95x1.35 smd paste+0 mask+0: 1(-0.75,0) 2(0.75,0)
  silkscreen extent -1.1,-1.07 1.1,1.07, body extent -1.4,-0.85 1.4,0.85, height 0.25
FP-C1206C-EB-MFG [mm]
  rect 0.95x1.7 smd paste+0 mask+0: 1(-1.4,0) 2(1.4,0)
  silkscreen extent -0.55,-0.9 0.55,0.9, body extent -2,-1 2,1, height 0.25
FP-C1210C226K4RACTU-MFG [mm]
  rect 1.2x2.7 smd paste+0 mask+0: 1(-1.3,0) 2(1.3,0)
  silkscreen extent -0.33,-1.36 0.33,1.36, body extent -2,-1.5 2,1.5, height 0.25
FP-CC0805-EB-MFG [mm]
  rect 0.95x1.4 smd paste+0 mask+0: 1(-0.925,0) 2(0.925,0)
  silkscreen extent 0,-0.72 0,0.72, body extent -1.73,-1.17 1.73,1.17, height 0.25
FP-CC1210-G3-MFG [mm]
  rect 1x2.7 smd paste+0 mask+0: 1(-1.5,0) 2(1.5,0)
  silkscreen extent -0.63,-1.4 0.63,1.4, body extent -2.32,-1.83 2.32,1.83, height 0.25
FP-CGA4J-MFG [mm]
  rect 0.8x1.05 smd paste+0 mask+0: 1(-0.925,0) 2(0.925,0)
  silkscreen extent -0.15,-0.72 0.15,0.72, body extent -1.43,-0.82 1.43,0.82, height 0.25
FP-CRGP1206-IPC_C [mm]
  rect 0.956x1.61 smd paste+0 mask+0: 1(-1.301,0) 2(1.301,0)
  silkscreen extent -0.52,-0.85 0.52,0.85, body extent -1.88,-0.95 1.88,0.95, height 0.25
FP-GRM21B-0_15-IPC_A [mm]
  rect 1.406x1.508 smd paste+0 mask+0: 1(-0.926,0) 2(0.926,0)
  silkscreen extent -1.63,-1.15 1.63,1.15, body extent -2.13,-1.25 2.13,1.25, height 0.25
FP-IHLP-2020BZ-FP_1_905x2-MFG [mm]
  rect 1.905x2.79 smd paste+0 mask+0: 1(-2.425,0) 2(2.425,0)
  silkscreen extent -2.72,-2.72 2.72,2.72, body extent -3.48,-2.82 3.48,2.82, height 0.25
FP-KRM55Q-6_1_5_3_3_9_1_2-MFG [mm]
  rect 2.7x5.6 smd paste+0 mask+0: 1(-2.65,0) 2(2.65,0)
  silkscreen extent -0.92,-2.75 0.92,2.75, body extent -4.1,-2.9 4.1,2.9, height 0.25
FP-LQFP48-5B-MFG [mm]
  rect 1.2x0.3 smd paste+0 mask+0: 1(-4.25,2.75) 2(-4.25,2.25) 3(-4.25,1.75) 4(-4.25,1.25) 5(-4.25,0.75) 6(-4.25,0.25) 7(-4.25,-0.25) 8(-4.25,-0.75) 9(-4.25,-1.25) 10(-4.25,-1.75) 11(-4.25,-2.25) 12(-4.25,-2.75) 25(4.25,-2.75) 26(4.25,-2.25) 27(4.25,-1.75) 28(4.25,-1.25) 29(4.25,-0.75) 30(4.25,-0.25) 31(4.25,0.25) 32(4.25,0.75) 33(4.25,1.25) 34(4.25,1.75) 35(4.25,2.25) 36(4.25,2.75)
  rect 0.3x1.2 smd paste+0 mask+0: 13(-2.75,-4.25) 14(-2.25,-4.25) 15(-1.75,-4.25) 16(-1.25,-4.25) 17(-0.75,-4.25) 18(-0.25,-4.25) 19(0.25,-4.25) 20(0.75,-4.25) 21(1.25,-4.25) 22(1.75,-4.25) 23(2.25,-4.25) 24(2.75,-4.25) 37(2.75,4.25) 38(2.25,4.25) 39(1.75,4.25) 40(1.25,4.25) 41(0.75,4.25) 42(0.25,4.25) 43(-0.25,4.25) 44(-0.75,4.25) 45(-1.25,4.25) 46(-1.75,4.25) 47(-2.25,4.25) 48(-2.75,4.25)
  silkscreen extent -5.62,-3.6 3.6,3.6, body extent -4.95,-4.95 4.95,4.95, height 0.25
FP-MCU0805-IPC_C [mm]
  rect 0.759x1.308 smd paste+0 mask+0: 1(-0.827,0) 2(0.827,0)
  silkscreen extent 0,-0.7 0,0.7, body extent -1.31,-0.8 1.31,0.8, height 0.25
FP-PCAN0805-MFG [mil]
  rect 42.5x52 smd paste+0 mask+0: 1(-31.25,0) 2(31.25,0)
  silkscreen extent -44,-42 43,41, body extent -56,-31 56,31, height 10
FP-RGE0024H-IPC_C [mm]
  rect 0.706x0.239 smd paste+0 mask+0: 1(-1.903,1.25)
  rrect100% 0.706x0.239 smd paste+0 mask+0: 2(-1.903,0.75) 3(-1.903,0.25) 4(-1.903,-0.25) 5(-1.903,-0.75) 6(-1.903,-1.25) 13(1.903,-1.25) 14(1.903,-0.75) 15(1.903,-0.25) 16(1.903,0.25) 17(1.903,0.75) 18(1.903,1.25)
  rrect100% 0.239x0.706 smd paste+0 mask+0: 7(-1.25,-1.903) 8(-0.75,-1.903) 9(-0.25,-1.903) 10(0.25,-1.903) 11(0.75,-1.903) 12(1.25,-1.903) 19(1.25,1.903) 20(0.75,1.903) 21(0.25,1.903) 22(-0.25,1.903) 23(-0.75,1.903) 24(-1.25,1.903)
  rect 2.8x2.8 smd paste-1000 mask+0: 25(0,0)
  silkscreen extent -2.96,-2 2,2, body extent -2.36,-2.36 2.36,2.36, height 0.25
FP-RK73H2A-IPC_B [mm]
  rect 1.055x1.362 smd paste+0 mask+0: 1(-0.925,0) 2(0.925,0)
  silkscreen extent -1.45,-1.08 1.45,1.08, body extent -1.7,-0.93 1.7,0.93, height 0.25
FP-RMCF0805-IPC_A [mm]
  rect 1.355x1.462 smd paste+0 mask+0: 1(-0.976,0) 2(0.976,0)
  silkscreen extent -1.65,-1.13 1.65,1.13, body extent -2.15,-1.23 2.15,1.23, height 0.25
FP-RN73R2A-IPC_A [mm]
  rect 1.255x1.556 smd paste+0 mask+0: 1(-1.025,0) 2(1.025,0)
  silkscreen extent -1.65,-1.18 1.65,1.18, body extent -2.15,-1.28 2.15,1.28, height 0.25
FP-RP73P-2A-MFG [mm]
  rect 1x1.35 smd paste+0 mask+0: 1(-1,0) 2(1,0)
  silkscreen extent -0.13,-0.7 0.13,0.7, body extent -1.6,-0.8 1.6,0.8, height 0.25
FP-RQ73C2A-IPC_B [mm]
  rect 1.058x1.362 smd paste+0 mask+0: 1(-0.877,0) 2(0.877,0)
  silkscreen extent -1.41,-1.08 1.41,1.08, body extent -1.66,-0.93 1.66,0.93, height 0.25
FP-RT0805-MFG [mm]
  rect 0.9x1.2 smd paste+0 mask+0: 1(-1.05,0) 2(1.05,0)
  silkscreen extent -0.23,-0.67 0.23,0.67, body extent -1,-0.63 1,0.63, height 0.6
FP-TMM-103-01-L-S-SM-MFG [mm]
  rect 1.02x3.56 smd paste+0 mask+0: 1(-2,1.015) 2(0,-1.015) 3(2,1.015)
  silkscreen extent -3,-1.05 3,3.49, body extent -3.1,-2.89 3.1,2.89, height 0.25
INDPM6054X300N [mm]
  rect 2.05x1.55 smd: 1(-2.55,0) 2(2.55,0)
  silkscreen extent -3,-2.7 3,2.7, body extent -3,-2.7 3,2.7, height 3
JST-S2B-PH-K-S_V [mm] "THD, 2-Leads, Body 7.6x5.9mm, Pitch 2mm"
  rect 1.2x1.2 hole 0.7: 1(-1,2.45)
  round 1.2 hole 0.7: 2(1,2.45)
  silkscreen extent -2.95,-3.8 2.95,4.35, body extent -2.95,-3.8 2.95,3.8, height 4.8
LEDC2012X80N [mm]
  rect 0.9x1.4 smd: 1(-0.95,0) 2(0.95,0)
  silkscreen extent -1.75,-1.05 0.95,1.05, body extent -1,-0.65 1,0.65, height 0.83
LIBRARYSOURCE=Vault [mm] "USB TYPE C VERTICAL PLUG"
  rect 0.6x1.14 smd: A1/B12(-3.2,3.605) A4/B9(-2.4,3.605) A9/B4(2.4,3.605) A12/B1(3.2,3.605)
  rect 0.3x1.14 smd: A5(-1.25,3.605) A6(-0.25,3.605) A7(0.25,3.605) A8(1.25,3.605) B5(1.75,3.605) B6(0.75,3.605) B7(-0.75,3.605) B8(-1.75,3.605)
  round 0.65 hole 0.65 unplated: MH1(-2.89,2.535) MH2(2.89,2.535)
  oval 1x2.1 hole 0.6 slot 1.7 at 90 deg: Shell(-4.32,3.035) Shell(4.32,3.035)
  oval 1x1.8 hole 0.6 slot 1.4 at 90 deg: Shell(-4.32,-1.145) Shell(4.32,-1.145)
  silkscreen extent -4.47,-3.22 4.48,1.7, body extent -4.79,-3.76 4.79,3.95, height 3.33
MSD5A [mm]
  rect 1.4x1.9 smd: G1(-6.575,6.925) G2(6.575,5.955)
  rect 1.3x1.4 smd: G3(-0.725,-7.225) G4(4.975,-7.225)
  rect 0.8x1.5 smd: P1(-1.925,3.075) P2(-0.825,2.875) P3(0.275,3.075) P4(1.375,3.275) P5(2.475,3.075) P6(3.575,3.275) P7(4.675,3.075) P8(5.775,3.075)
  rect 1x0.85 smd: P9(3.585,-7.5)
  silkscreen extent -7.8,-7.63 7,7.63, body extent -7.04,-7.73 7.11,7.72, height 1.96
MTH [mm]
  round 4.5 hole 3.2: 1(0,0)
  silkscreen extent -2.54,-2.54 2.54,2.54
QFN50P400X400X80-25N [mm]
  rect 0.85x0.3 smd: 1(-1.95,1.25) 2(-1.95,0.75) 3(-1.95,0.25) 4(-1.95,-0.25) 5(-1.95,-0.75) 6(-1.95,-1.25) 13(1.95,-1.25) 14(1.95,-0.75) 15(1.95,-0.25) 16(1.95,0.25) 17(1.95,0.75) 18(1.95,1.25)
  rect 0.3x0.85 smd: 7(-1.25,-1.95) 8(-0.75,-1.95) 9(-0.25,-1.95) 10(0.25,-1.95) 11(0.75,-1.95) 12(1.25,-1.95) 19(1.25,1.95) 20(0.75,1.95) 21(0.25,1.95) 22(-0.25,1.95) 23(-0.75,1.95) 24(-1.25,1.95)
  rect 2.63x2.63 smd: 25(0,0)
  silkscreen extent -2.5,1.88 -2.25,2.13, body extent -2.05,-2.05 2.05,2.05, height 0.8
RESC2013X60X35LL10T20 [mm] "Chip Resistor, 2-Leads, Body 2.00x1.25mm, IPC High Density"
  rect 0.8x1.25 smd: 1(-0.8,0) 2(0.8,0)
  silkscreen extent -0.1,-0.53 0.1,0.53, body extent -1.05,-0.67 1.05,0.67, height 0.6
RESC2013X60X35ML10T20 [mm] "Chip Resistor, 2-Leads, Body 2.00x1.25mm, IPC Low Density"
  rect 1.2x1.45 smd: 1(-1,0) 2(1,0)
  silkscreen extent -0.1,-0.63 0.1,0.63, body extent -1.05,-0.67 1.05,0.67, height 0.6
RESC2013X60X35NL10T20 [mm] "Chip Resistor, 2-Leads, Body 2.00x1.25mm, IPC Medium Density"
  rect 1x1.35 smd: 1(-0.9,0) 2(0.9,0)
  silkscreen extent -0.1,-0.58 0.1,0.58, body extent -1.05,-0.67 1.05,0.67, height 0.6
RESC7146X175N [mm]
  rect 3.9x4.85 smd: 1(-2.1,0) 2(2.1,0)
  body extent -3.55,-2.3 3.55,2.3, height 1.5
SOIC127P600X175-8N [mm]
  rect 1.525x0.7 smd: 1(-2.712,1.905) 2(-2.712,0.635) 3(-2.712,-0.635) 4(-2.712,-1.905) 5(2.712,-1.905) 6(2.712,-0.635) 7(2.712,0.635) 8(2.712,1.905)
  silkscreen extent -3.47,-2.45 1.6,2.61, body extent -3,-2.45 3,2.45, height 1.75
SOP65P490X110-8N [mm]
  rect 1.4x0.45 smd: 1(-2.2,0.975) 2(-2.2,0.325) 3(-2.2,-0.325) 4(-2.2,-0.975) 5(2.2,-0.975) 6(2.2,-0.325) 7(2.2,0.325) 8(2.2,0.975)
  silkscreen extent -2.9,-1.5 1.15,1.55, body extent -2.45,-1.5 2.45,1.5, height 1.1
SOP65P640X110-20N [mm]
  rect 1.475x0.45 smd: 1(-2.938,2.925) 2(-2.938,2.275) 3(-2.938,1.625) 4(-2.938,0.975) 5(-2.938,0.325) 6(-2.938,-0.325) 7(-2.938,-0.975) 8(-2.938,-1.625) 9(-2.938,-2.275) 10(-2.938,-2.925) 11(2.938,-2.925) 12(2.938,-2.275) 13(2.938,-1.625) 14(2.938,-0.975) 15(2.938,-0.325) 16(2.938,0.325) 17(2.938,0.975) 18(2.938,1.625) 19(2.938,2.275) 20(2.938,2.925)
  silkscreen extent -3.67,-3.25 1.85,3.5, body extent -3.21,-3.2 3.21,3.3, height 1.08
SOT95P275X110-6N [mm]
  rect 1.25x0.6 smd: 1(-1.25,0.95) 2(-1.25,0) 3(-1.25,-0.95) 4(1.25,-0.95) 5(1.25,0) 6(1.25,0.95)
  silkscreen extent -1.88,-1.48 0.28,1.6, body extent -1.4,-1.45 1.4,1.45, height 1.18
SOT95P280X110-6N [mm]
  rect 1.25x0.6 smd: 1(-1.25,0.95) 2(-1.25,0) 3(-1.25,-0.95) 4(1.25,-0.95) 5(1.25,0) 6(1.25,0.95)
  silkscreen extent -1.88,-1.45 0.28,1.6, body extent 0,0 0,0
TB0011-350-08BE [mm]
  rect 1.65x1.65 hole 1.1: 1(0,0)
  round 1.65 hole 1.1: 2(-3.5,0) 3(-7,0) 4(-10.5,0) 5(-14,0) 6(-17.5,0) 7(-21,0) 8(-24.5,0)
  silkscreen extent -26.75,-3.45 3.1,3.45, body extent -26.82,-3.45 2.18,3.45, height 8.5
WE-PMFI_322512 [mm] "SMT Power Inductor, body 3.20 x 2.50 mm"
  rect 1.2x2.8 smd: 1(-1.45,0) 2(1.45,0)
  body extent -1.6,-1.25 1.6,1.25, height 1.2

## Part data
32 C20 C31 C32: library part CMP-03020-034651-1, "CAP CER 22UF 16V X7R 1210", Case Code (Imperial)=1210, Case Code (Metric)=3225, Dielectric=X7R, Dielectric Material=Ceramic, Max Operating Temperature=125°C, Min Operating Temperature=-55°C, Package Quantity=1000, Tolerance=10%, Voltage=16V, Capacitance=22uF, Case/Package=1210, Depth=2.5mm, Dissipation Factor=5%, Height=2.5mm, Length=3.2mm, Mount="Surface Mount", Packaging="Cut Tape", REACH SVHC="No SVHC", Termination=SMD/SMT, Thickness=0.11inch, Voltage Rating=16V, Voltage Rating (DC)=16V, Weight=0.000564oz, Width=0.098inch
B1: "Board Mount Hall Effect/Magnetic Sensors", Manufacturer_Name="Texas Instruments", Mouser Part Number=595-MAG5170A2EDGKRQ1, Datasheet Link=https://www.ti.com/lit/gpn/tmag5170-q1, Geometry.Height=1.1mm, Manufacturer_Part_Number=TMAG5170A2EDGKRQ1, Mouser Price/Stock=https://www.mouser.co.uk/ProductDetail/Texas-Instruments/TMAG5170A2EDGKRQ1?qs=doiCPypUmgFsK4QjDrwHCw%3D%3D
C1 C2 C3 C4 C5 C6 C11 C13 C14 C16 C24: library part CMP-2007-01396-1, Manufacturer=Vitramon, Part Number=VJ0805Y104JXXPW1BC
C7 C36: library part CMP-03020-034682-1, "CAP CER 0805 4.7UF 25V X7R  10%", RoHS Compliant=Yes
C8 C10: library part CMP-03422-000665-2, "CAP CER 1UF 6.3V X7R 0805", Case Code (Imperial)=0805, Case Code (Metric)=2012, Dielectric=X7R, Max Operating Temperature=125°C, Min Operating Temperature=-55°C, Resistor Type=Ceramic, Tolerance=10%, Voltage Rating=6.3V, Capacitance=1uF, Case/Package=0805, Construction=Flat, Depth=1.25mm, Halogen Free="Halogen Free", Height=1.25mm, Lead Free="Lead Free", Length=2mm, Mount="Surface Mount", Packaging="Tape and Reel", Radiation Hardening=No, RoHS Compliant=Yes, Series=CC, Termination=SMD/SMT, Thickness=0.057inch, Voltage Rating (DC)=6.3V, Weight=0.000194oz, Width=0.049inch
C9 C17 C21 C23: library part CMP-03422-000545-1, "AC Series 0805 10 nF 100 V ±10% X7R Multilayer Ceramic Capacitor", Capacitance="10 nF", Manufacturer=Yageo, Manufacturer Part Number=AC0805KRX7R0BB103, Package=AC0805-0.85, Temperature="-55°C to +125°C", Temperature Characteristic=X7R, Temperature Coefficient=15%, Temperature Range High=+125°C, Temperature Range Low=-55°C, Tolerance=0.1, Voltage Rating="100 V", Automotive=Yes, Automotive Grade="Grade 1", Category=Cap, ComponentLink2Description=Datasheet, ComponentLink2URL=http://www.yageo.com/documents/recent/UPY-AC_NP0X7R_16V-to-630V_12.pdf, Device Class L1="Passive Components", Device Class L2=Capacitors, Device Class L3="Ceramic Capacitors", Digikey Description="AC Series 0805 10 nF 100 V ±10% X7R Multilayer Ceramic Capacitor", Footprint Url=http://www.yageo.com/exep/pages/download/literatures/UPY-C_GEN_24.pdf, Height=0.95mm, Ipc Land Pattern Name=CAPC200125X85, Lead Free=Yes, Material=Ceramic, Mouser Description="AC Series 0805 10 nF 100 V ±10% X7R Multilayer Ceramic Capacitor", Octopart=https://octopart.com/ac0805krx7r0bb103-yageo-75656636, RoHS=TRUE
C12: library part CMP-2007-04702-1, Manufacturer="AVX Interconnect / Elco", Part Number=0805ZC106KAT2A
C15 C25 C26: library part CMP-03020-021882-1, "CAP CER 0.47UF 25V X7R 0805", Capacitance="0.47 μF", Manufacturer=KEMET, Manufacturer Part Number=C0805C474J3RACAUTO, Package=C0805C-DN, Temperature="-55°C to +125°C", Temperature Characteristic=X7R, Temperature Coefficient=30ppm/°C, Temperature Range High=+125°C, Temperature Range Low=-55°C, Tolerance=0.05, Voltage Rating="25 V", Automotive=No, Category=Cap, ComponentLink2Description=Datasheet, ComponentLink2URL=https://content.kemet.com/datasheets/KEM_C1003_C0G_SMD.pdf, Device Class L1="Passive Components", Device Class L2=Capacitors, Device Class L3="Ceramic Capacitors", Digikey Description="CAP CER 0.47UF 25V X7R 0805", Height=0.88mm, Ipc Land Pattern Name=CAPC200125X78, Lead Free=Yes, Material=Ceramic, Octopart=https://octopart.com/c0805c474j3racauto-kemet-20760776, RoHS=TRUE
C18: library part CMP-2007-03742-2, "CAP CER 0.1UF 50V Z5U 0805", Case Code (Imperial)=0805, Case Code (Metric)=2012, Dielectric=Z5U, Dielectric Material=Ceramic, Max Operating Temperature=85°C, Min Operating Temperature=10°C, Package Quantity=1, Tolerance=20%, Voltage=50V, Capacitance=100nF, Case/Package=0805, Construction=Flat, Contact Plating=Tin, Depth=1.25mm, Dissipation Factor=4%, Height=0.78mm, Lead Free="Lead Free", Lead Pitch=0.75mm, Length=2mm, Mount="Surface Mount", Number of Pins=2, Packaging="Tape and Reel", Radiation Hardening=No, REACH SVHC="No SVHC", RoHS Compliant=Yes, Series=C, Termination=SMD/SMT, Thickness=0.035inch, Voltage Rating=50V, Voltage Rating (DC)=50V, Width=1.2mm
C19 C30 C37: library part CMP-06035-013048-1, "Chip Multilayer Ceramic Capacitors for General Purpose, 0805, 10uF, X5R, 15%, 20%, 25V", Case Code (Imperial)=0805, Case Code (Metric)=2012, Dielectric=X5R, Max Operating Temperature=85°C, Min Operating Temperature=-55°C, Package Quantity=3000, Resistor Type=Ceramic, Tolerance=20%, Voltage Rating=25V, Capacitance=10uF, Case/Package=0805, Depth=1.25mm, Height=1.25mm, Lead Free="Lead Free", Length=2mm, Mount="Surface Mount", Packaging="Tape and Reel", REACH SVHC="No SVHC", Termination=SMD/SMT, Thickness=0.055inch, Voltage Rating (DC)=25V, Weight=0.000335oz, Width=0.049inch
C22 C34: library part CMP-03422-001503-1, "CAP CER 1210", Case/Package=1210, Dielectric=X7R, Max Operating Temperature=125°C, Min Operating Temperature=-55°C, Tolerance=10%, Capacitance=2.2uF, Depth=2.5mm, Length=3.2mm, Packaging="Tape and Reel", RoHS Compliant=Yes
C27 C29: library part CMP-08246-006910-1, "Cap Ceramic 1uF 16V X7R 10% Pad SMD 0805 +125°C Automotive T/R", Case Code (Imperial)=0805, Case Code (Metric)=2012, Dielectric=X7R, Max Operating Temperature=125°C, Min Operating Temperature=-55°C, Package Quantity=2000, Ratings=AEC-Q200, Tolerance=10%, Voltage Rating=16V, Capacitance=1uF, Case/Package=0805, Height=1.25mm, Length=0.079inch, Mount="Surface Mount", Packaging="Tape and Reel", RoHS Compliant=Yes, Series=CGA, Thickness=0.049inch, Voltage Rating (DC)=16V, Weight=0.000194oz, Width=0.049inch
C28: library part CMP-2007-03742-2, "CAP CER 0.1UF 50V Z5U 0805", Capacitance=100nF, Case Code (Imperial)=0805, Case Code (Metric)=2012, Dielectric=Z5U, Dielectric Material=Ceramic, Max Operating Temperature=85°C, Min Operating Temperature=10°C, Package Quantity=1, Tolerance=20%, Voltage=50V, Case/Package=0805, Construction=Flat, Contact Plating=Tin, Depth=1.25mm, Dissipation Factor=4%, Height=0.78mm, Lead Free="Lead Free", Lead Pitch=0.75mm, Length=2mm, Mount="Surface Mount", Number of Pins=2, Packaging="Tape and Reel", Radiation Hardening=No, REACH SVHC="No SVHC", RoHS Compliant=Yes, Series=C, Termination=SMD/SMT, Thickness=0.035inch, Voltage Rating=50V, Voltage Rating (DC)=50V, Width=1.2mm
C33: library part CMP-06035-051390-1, "Cap Ceramic 33uF 25V X7R ±10% SMD 2220 +125°C Emboss T/R"
C35: library part CMP-03020-010277-1, "CAP CER 0.047UF 50V X8R 1206", Capacitance="47,000 pF", Manufacturer=KEMET, Manufacturer Part Number=C1206C473K5HACTU, Package=C1206C-EB, Temperature="-55°C to +150°C", Temperature Characteristic=X8R, Temperature Coefficient=15%, Temperature Range High=+150°C, Temperature Range Low=-55°C, Tolerance=0.1, Voltage Rating="50 V", Automotive=Yes, Automotive Grade="Grade 0", Category=Cap, ComponentLink2Description=Datasheet, ComponentLink2URL=https://content.kemet.com/datasheets/KEM_C1007_X8R_ULTRA_150C_SMD.pdf, Device Class L1="Passive Components", Device Class L2=Capacitors, Device Class L3="Ceramic Capacitors", Digikey Description="CAP CER 0.047UF 50V X8R 1206", Height=0.88mm, Ipc Land Pattern Name=CAPC320160X78, Lead Free=Yes, Material=Ceramic, Mouser Description="Multilayer Ceramic Capacitors MLCC - SMD/SMT 50V 47000pF +/-10% X8R", Octopart=https://octopart.com/c1206c473k5hactu-kemet-12793246, RoHS=TRUE
IC1 IC2: "Integrated Circuit", Manufacturer_Name=Nexperia, Mouser Part Number=771-74AHCT245APWJ, Arrow Part Number=74AHCT245APWJ, Arrow Price/Stock=https://www.arrow.com/en/products/74ahct245apwj/nexperia, Datasheet Link=https://assets.nexperia.com/documents/data-sheet/74AHCT245A.pdf, Height=1.1mm, Manufacturer_Part_Number=74AHCT245APWJ, Mouser Price/Stock=https://www.mouser.co.uk/ProductDetail/Nexperia/74AHCT245APWJ?qs=u4fy%2FsgLU9Nfcswc3zVmFw%3D%3D
IC3 IC5: "Integrated Circuit", Manufacturer_Name="Texas Instruments", Mouser Part Number=595-LMR51430XFDDCR, Arrow Part Number=LMR51430XFDDCR, Arrow Price/Stock=https://www.arrow.com/en/products/lmr51430xfddcr/texas-instruments.html?utm_currency=USD&region=nac, Datasheet Link=https://www.ti.com/lit/ds/symlink/lmr51420.pdf?ts=1651317966125, Height=1.1mm, Manufacturer_Part_Number=LMR51430XFDDCR, Mouser Price/Stock=https://www.mouser.co.uk/ProductDetail/Texas-Instruments/LMR51430XFDDCR?qs=vvQtp7zwQdOoH7ISqkGKmw%3D%3D
IC4: "Integrated Circuit", Manufacturer_Name="Analog Devices", Mouser Part Number=700-MAX17320G20+, Arrow Part Number=MAX17320G20+, Arrow Price/Stock=https://www.arrow.com/en/products/max17320g20/analog-devices?utm_currency=USD&region=nac, Datasheet Link=https://www.analog.com/MAX17320/datasheet, Height=0.8mm, Manufacturer_Part_Number=MAX17320G20+, Mouser Price/Stock=https://www.mouser.co.uk/ProductDetail/Analog-Devices-Maxim-Integrated/MAX17320G20%2b?qs=sPbYRqrBIVnSGVqLjzq7LQ%3D%3D
IC6: "Integrated Circuit", Manufacturer_Name=onsemi, Mouser Part Number=512-FDC608PZ, Arrow Part Number=FDC608PZ, Arrow Price/Stock=https://www.arrow.com/en/products/fdc608pz/on-semiconductor?utm_currency=USD&region=nac, Datasheet Link=https://www.onsemi.com/pub/Collateral/FDC608PZ-D.PDF, Height=1.1mm, Manufacturer_Part_Number=FDC608PZ, Mouser Price/Stock=https://www.mouser.co.uk/ProductDetail/onsemi-Fairchild/FDC608PZ?qs=cunaKtMgX5PRvFzPztrrbg%3D%3D
J1: library part CMP-02766-001735-1, "CONN HEADER SMD 3POS 2MM", Flammability Rating="UL94 V-0", Housing Color=Black, Max Current Rating=3.9A, Max Operating Temperature=125°C, Max Voltage Rating (AC)=500V, Min Operating Temperature=-55°C, Connector Type=Header, Contact Finish - Mating=GOLD, Contact Material=Bronze, Contact Plating=Gold, Contact Shape=Square, Contact Type="Male Pin", Depth=1.97mm, Fastening Type=Pull, Gender=Male, Housing Material=Polymer, Insulation Color=Black, Insulation Material=Polymer, Lead Free="Lead Free", Length=6mm, Number of Contacts=3, Number of Positions=3, Number of Rows=1, Orientation=Straight, Packaging=Bulk, Pitch=2mm, Radiation Hardening=No, REACH SVHC="No SVHC", RoHS Compliant=Yes, Series=TMM, Termination=Solder
J2 J3: "Connector", Manufacturer_Name="Same Sky", Datasheet Link=https://www.sameskydevices.com/product/resource/tb0011-350.pdf, Height=8.5mm, Manufacturer_Part_Number=TB0011-350-08BE
J4: "Connector", Manufacturer_Name="Same Sky", Mouser Part Number=179-MSD-5-A, Arrow Part Number=MSD-5-A, Arrow Price/Stock=https://www.arrow.com/en/products/msd-5-a/cui-devices?utm_currency=USD&region=nac, Datasheet Link=https://www.sameskydevices.com/product/resource/msd-5-a.pdf, Height=2.15mm, Manufacturer_Part_Number=MSD-5-A, Mouser Price/Stock=https://www.mouser.co.uk/ProductDetail/Same-Sky/MSD-5-A?qs=Z%252BL2brAPG1IFv3XQ8lubzw%3D%3D
J5: library part CMP-207978-000003-3, "Usb Conn, R/a, Type C 2.0, Rcpt, 16POS Rohs Compliant: Yes", Current Rating=5A, Insulation Resistance=100MΩ, Max Operating Temperature=85°C, Min Operating Temperature=-40°C, Voltage Rating=20V, Contact Material="Gold, Nickel", Gender=Receptacle, Height=3.51mm, Number of Contacts=12, Number of Pins=16, Packaging="Tape and Reel", Pin Length=950µm, RoHS=Compliant, USB Standard="USB 2.0"
L1: library part CMP-02424-000260-1, "Fixed Inductors Commercial Low DCR Series 2.2uH 5A 37.7mΩ 20%", Case/Package=2020, Current Rating=5A, DC Resistance (DCR)=37.7mR, Inductance Tolerance=20%, Max DC Current=5.5A, Max Operating Temperature=125°C, Min Operating Temperature=-55°C, Package Quantity=2000, Self Resonant Frequency=41MHz, Test Frequency=100kHz, Contact Plating=Tin, Core Material=Metal, Depth=5.43mm, Height=2mm, Height - Seated (Max)=0.079inch, Inductance=2.2uH, Lead Free="Lead Free", Length=5.74mm, Military Standard=Not, Mount="Surface Mount", Number of Pins=2, Packaging="Tape and Reel", Radiation Hardening=No, RMS Current (Irms)=5A, Saturation Current=5.5A, Shielding=Shielded, Termination=SMD/SMT, Tolerance=20%, Width=0.204inch
L2: library part PA4340.332NLT, "Inductor", Manufacturer_Name="Yageo Group", Mouser Part Number=673-PA4340.332NLT, Arrow Part Number=PA4340.332NLT, Arrow Price/Stock=https://www.arrow.com/en/products/pa4340.332nlt/pulse-electronics-corporation?utm_currency=USD&region=europe, Datasheet Link=https://www.arrow.com/en/products/pa4340.332nlt/pulse-electronics-corporation, Height=3mm, Manufacturer_Part_Number=PA4340.332NLT, Mouser Price/Stock=https://www.mouser.co.uk/ProductDetail/Pulse-Electronics/PA4340332NLT?qs=%2FzQKu7YvIMZ40DmrCvsoMQ%3D%3D
L3: library part CMP-03913-162350127-1, "Power Ind, 1UH, 5.8A, Shielded, 1210 Rohs Compliant: Yes"
LED1 LED2: "LED", Arrow Part Number="LG R971-KN-1", Manufacturer_Name="ams OSRAM", Mouser Part Number=720-LGR971-KN-1, Arrow Price/Stock=https://www.arrow.com/en/products/lgr971-kn-1/osram-opto-semiconductors, Datasheet Link="http://www.mouser.com/ds/2/311/LG R971 - CHIPLED 0805-318376.pdf", Height=0.8mm, Manufacturer_Part_Number="LG R971-KN-1", Mouser Price/Stock=https://www.mouser.co.uk/ProductDetail/ams-OSRAM/LG-R971-KN-1?qs=LsPilcdHE7EX1EB7GCLHxg%3D%3D
P1: library part CMP-03913-133967346-2, "Conn, Hdr, 14Pos, 2Row, 1.27Mm, Smt Rohs Compliant: Yes", Current Rating=1A, Insulation Resistance=1GΩ, Max Operating Temperature=105°C, Min Operating Temperature=-40°C, Length=13.64mm, Number of Pins=14, Pitch=1.27mm, RoHS=Compliant
P2 P3 P4 P5: library part CMP-1755-00004-1, "Male Header, Pitch 2 mm, 1 x 2 Position, Height 4.8 mm, Tail Length 3.4 mm, -25 to 85 degC, RoHS, Bulk", Capacitance="10 uF", Case\Package=Radial, Max Operating Temperature="85 degC", Min Operating Temperature="-40 degC", Package Quantity=200, Tolerance=20%, Voltage Rating="50 V", ComponentLink1Description=Datasheet, ComponentLink1URL=http://www.jst-mfg.com/product/pdf/eng/ePH.pdf, DatasheetVersion=Dec-12, Diameter="5 mm", Height="11 mm", Lead Pitch="2 mm", Length="11 mm", Mount="Through Hole", PackageDescription="Male Header, Pitch 2 mm, 1 x 2 Position, Height 4.8 mm, Tail Length 3.4 mm", PackageReference=S2B-PH-K-S, Packaging=Bulk, Pins=2, Radiation Hardening=No, REACH SVHC="No SVHC", RoHSCompliant=true, Voltage Rating (DC)="50 V"
Q1: "MOSFET (N-Channel)", Manufacturer_Name=Infineon, Mouser Part Number=726-IRF7313TRPBFXTMA, Arrow Part Number=IRF7313TRPBFXTMA1, Arrow Price/Stock=https://www.arrow.com/en/products/irf7313trpbfxtma1/infineon-technologies-ag?utm_currency=USD&region=nac, Datasheet Link=https://www.mouser.co.uk/datasheet/2/196/Infineon_IRF7313_DataSheet_v01_01_EN-3224007.pdf, Height=1.75mm, Manufacturer_Part_Number=IRF7313TRPBFXTMA1, Mouser Price/Stock=https://www.mouser.co.uk/ProductDetail/Infineon-Technologies/IRF7313TRPBFXTMA1?qs=1Kr7Jg1SGW%2FUB%252Bqt0Ezjig%3D%3D
R1 R2 R3 R4 R5 R25: library part CMP-03412-049031-1, "Thin Film Chip Resistors Automotive Grade 10kΩ 0.5% 50ppm/°C 0805", Case/Package=0805, Max Operating Temperature=155°C, Max Power Dissipation=125mW, Min Operating Temperature=-55°C, Ratings=AEC-Q200, Resistance=10kR, Resistor Type="Thin Film", Temperature Coefficient=50ppm/°C, Tolerance=0.5%, Features="Moisture Resistant", Height=0.024inch, Length=0.079inch, Number of Terminations=2, Packaging="Tape and Reel", RoHS Compliant=Yes, Series=AT, Width=0.049inch
R6: library part CMP-03412-028312-1, "RES SMD 47K OHM 1% 1/8W 0805", Manufacturer=Yageo, Manufacturer Part Number=RT0805FRD0747KL, Package=RT0805, Power Rating=0.125W, Resistance=47KΩ, Temperature="-55°C to +155°C", Temperature Coefficient="25 ppm/°C", Temperature Range High=+155°C, Temperature Range Low=-55°C, Tolerance=0.0001, Voltage Rating=150V, Automotive=No, Category=Res, ComponentLink2Description=Datasheet, ComponentLink2URL=http://www.yageo.com/documents/recent/PYu-RT_1-to-0.01_RoHS_L_9.pdf, Composition="Thin Film", Device Class L1="Passive Components", Device Class L2=Resistors, Device Class L3="Chip SMD Resistors", Digikey Description="RES SMD 47K OHM 1% 1/8W 0805", Footprint Url=http://www.yageo.com/exep/pages/download/literatures/PYu-R_Mount_10.pdf, Height=0.6mm, Ipc Land Pattern Name=RESC200125X50, Lead Free=Yes, Octopart=https://octopart.com/rt0805frd0747kl-yageo-71400071, RoHS=TRUE, Series=RT
R7 R12: library part CMP-02407-000038-1, "RES SMD 1K OHM 0.1% 1W 0805", Manufacturer=Vishay, Manufacturer Part Number=PCAN0805E1001BST5, Package=PCAN0805, Power Rating=1W, Resistance=1kΩ, Temperature="-55°C to +155°C", Temperature Coefficient=25ppm/°C, Temperature Range High=+155°C, Temperature Range Low=-55°C, Tolerance=0.1%, Voltage Rating=100V, Automotive=No, Category=Res, ComponentLink2Description=Datasheet, ComponentLink2URL=https://www.vishay.com/docs/60125/pcan.pdf, Composition="Thin Film", Device Class L1="Passive Components", Device Class L2=Resistors, Device Class L3="Chip SMD Resistors", Digikey Description="RES SMD 1K OHM 0.1% 1W 0805", Height=0.018inch, Ipc Land Pattern Name=RESC203127X38, Lead Free=Yes, Octopart=https://octopart.com/pcan0805e1001bst5-vishay-73274806, RoHS=TRUE, Series=PCAN
R8 R19 R27: library part CMP-03211-011351-1, "RQ73 0805 100KΩ 0.2W 10ppm/°C 0.1% 100V"
R9 R10: library part CMP-03211-007286-1, "CRGP1206 47Ω 0.5W ±100ppm/°C 1% 200V", Ambient Temperature Range High=+70°C, Manufacturer=TE, Manufacturer Part Number=CRGP1206F47R, Package=CRGP1206, Power Rating=0.5W, Resistance=47Ω, Temperature="-55°C to +155°C", Temperature Coefficient=±100ppm/°C, Temperature Range High=+155°C, Temperature Range Low=-55°C, Tolerance=0.01, Voltage Rating=200V, Automotive=No, Category=Res, ComponentLink2Description=Datasheet, ComponentLink2URL=https://www.mouser.com/datasheet/2/418/NG_DS_9-1773463-9_A-1358566.pdf, Composition="Thick Film", Device Class L1="Passive Components", Device Class L2=Resistors, Device Class L3="Chip SMD Resistors", Height=0.65mm, Ipc Land Pattern Name=RESC310155X55, Lead Free=Yes, Mouser Description="SMD Precision Pulse Thick Film Chip Resistor", Octopart=https://octopart.com/crgp1206f47r-te+connectivity-91018885, RoHS=TRUE, Series=CRGP
R11: library part CMP-2001-01692-2, "RES SMD 22.1K OHM 0.1% 1/8W 0805", Manufacturer=Yageo, Manufacturer Part Number=RT0805BRD0722K1L, Package=RT0805, Power Rating=0.125W, Resistance=22.1KΩ, Temperature="-55°C to +155°C", Temperature Coefficient="25 ppm/°C", Temperature Range High=+155°C, Temperature Range Low=-55°C, Tolerance=0.0025, Voltage Rating=150V, Automotive=No, Category=Res, ComponentLink2Description=Datasheet, ComponentLink2URL=http://www.yageo.com/documents/recent/PYu-RT_1-to-0.01_RoHS_L_9.pdf, Composition="Thin Film", Device Class L1="Passive Components", Device Class L2=Resistors, Device Class L3="Chip SMD Resistors", Digikey Description="RES SMD 22.1K OHM 0.1% 1/8W 0805", Footprint Url=http://www.yageo.com/exep/pages/download/literatures/PYu-R_Mount_10.pdf, Height=0.6mm, Ipc Land Pattern Name=RESC200125X50, Lead Free=Yes, Mouser Description="Thin Film Resistors - SMD 1/8W 22.1K ohm .1% 25ppm", Octopart=https://octopart.com/rt0805brd0722k1l-yageo-1447960, RoHS=TRUE, Series=RT
R13 R15: library part CMP-04015-040511-1, "100Ω ±0.1% 0.125W, 1/8W Chip Resistor 0805 (2012 Metric) Moisture Resistant Thin Film"
R14: library part WSHP28185L000FEA, "Resistor", Manufacturer_Name=Vishay, Mouser Part Number=71-WSHP28185L000FEA, Arrow Part Number=WSHP28185L000FEA, Arrow Price/Stock=https://www.arrow.com/en/products/wshp28185l000fea/vishay?utm_currency=USD&region=nac, Datasheet Link=https://componentsearchengine.com/Datasheets/1/WSHP28185L000FEA.pdf, Height=1.75mm, Manufacturer_Part_Number=WSHP28185L000FEA, Mouser Price/Stock=https://www.mouser.co.uk/ProductDetail/Vishay-Dale/WSHP28185L000FEA?qs=WY0B%252Bpw29jOU8WmnTnxtZg%3D%3D
R16 R18: library part CMP-26527-006895-1, "560Ω ±5% 0.125W 0805 Thick Film Chip Resistor AEC-Q200 compliant", Case Code (Imperial)=0805, Case Code (Metric)=2012, Max Operating Temperature=155°C, Max Power Dissipation=125mW, Min Operating Temperature=-55°C, Resistor Type="Thick Film", Temperature Coefficient=200ppm/°C, Tolerance=5%, Case/Package=0805, Construction=Rectangular, Contact Plating=Tin, Depth=1.25mm, Features="Automotive AEC-Q200", Height=0.026inch, Lead Free="Lead Free", Length=0.079inch, Military Standard=Not, Mount="Surface Mount", Number of Terminations=2, Packaging="Tape and Reel", Radiation Hardening=No, Resistance=560R, RoHS Compliant=Yes, Series=RMCF, Width=0.049inch
R17: library part CMP-04015-107892-1, "150kΩ ±1% 0.25W Chip Resistor 0805 Thick Film AEC-Q200 Qualified", Case Code (Imperial)=0805, Case Code (Metric)=2012, Max Operating Temperature=155°C, Min Operating Temperature=-55°C, Power Rating=125mW, Resistance=150kR, Temperature Coefficient=100ppm/°C, Tolerance=1%, Voltage Rating=150V, Case/Package=0805, Lead Free="Lead Free", Packaging="Tape and Reel", RoHS Compliant=Yes, Series=RK73H, Termination=SMD/SMT, Voltage Rating (DC)=150V
R20: library part CMP-03211-002209-1, "RP73P 0805 5.23KΩ 0.25W 25ppm/°C 0.10% 150V", Manufacturer="TE Connectivity", Manufacturer Part Number=RP73PF2A5K23BTDF, Package=RP73P-2A, Power Rating=0.25W, Resistance=5.23KΩ, Temperature="-55°C to +155°C", Temperature Coefficient=25ppm/°C, Temperature Range High=+155°C, Temperature Range Low=-55°C, Tolerance=0.001, Voltage Rating=150V, Automotive=No, Category=Res, ComponentLink2Description=Datasheet, ComponentLink2URL=https://www.te.com/commerce/DocumentDelivery/DDEController?Action=srchrtrv&DocNm=1773272&DocType=DS&DocLang=English, Composition="Thin Film", Device Class L1="Passive Components", Device Class L2=Resistors, Device Class L3="Chip SMD Resistors", Height=0.65mm, Ipc Land Pattern Name=RESC200125X55, Lead Free=Yes, Octopart=https://octopart.com/rp73pf2a5k23btdf-te+connectivity-45467027, RoHS=TRUE, Series=RP73P
R21: library part CMP-2001-01209-1, Manufacturer=Yageo, Part Number=RC0805FR-075K76L
R22: library part CMP-2000-05824-2, "Thermistor NTC 10KOhm 1% 2-Pin", Max Operating Temperature=110°C, Min Operating Temperature=-50°C, Resistance=10kR, Tolerance=1%, Height=2.4mm, Lead Pitch=2.54mm, Length=17mm, Number of Pins=2, Packaging=Bulk, RoHS Compliant=Yes, Series=AT, Termination=Radial, Width=3.7mm
R23: library part CMP-02407-010493-1, "RES 1.05K OHM 0.5% 1/5W 0805", Case/Package=0805, Max Operating Temperature=125°C, Max Power Dissipation=125mW, Min Operating Temperature=-55°C, Package Quantity=1000, Resistance=30.1kR, Temperature Coefficient=25ppm/°C, Tolerance=0.1%, Composition="Thin Film", Contact Plating=Tin, Depth=1.25mm, Height=0.022inch, Lead Free="Lead Free", Length=0.079inch, Military Standard=Not, Number of Terminations=2, Packaging="Tape and Reel", Radiation Hardening=No, Width=0.049inch
R24: library part CMP-03412-025952-1, "RES 13.7K OHM 1/8W .1% SMD 0805", Manufacturer=Yageo, Manufacturer Part Number=RT0805BRD0713K7L, Package=RT0805, Power Rating=0.125W, Resistance=13.7KΩ, Temperature="-55°C to +155°C", Temperature Coefficient="25 ppm/°C", Temperature Range High=+155°C, Temperature Range Low=-55°C, Tolerance=0.0025, Voltage Rating=150V, Automotive=No, Category=Res, ComponentLink2Description=Datasheet, ComponentLink2URL=http://www.yageo.com/documents/recent/PYu-RT_1-to-0.01_RoHS_L_9.pdf, Composition="Thin Film", Device Class L1="Passive Components", Device Class L2=Resistors, Device Class L3="Chip SMD Resistors", Digikey Description="RES 13.7K OHM 1/8W .1% SMD 0805", Footprint Url=http://www.yageo.com/exep/pages/download/literatures/PYu-R_Mount_10.pdf, Height=0.6mm, Ipc Land Pattern Name=RESC200125X50, Lead Free=Yes, Mouser Description="Thin Film Resistors - SMD 1/8W 13.7K ohm .1% 25ppm", Octopart=https://octopart.com/rt0805brd0713k7l-yageo-1409410, RoHS=TRUE, Series=RT
R26: library part CMP-2001-01108-1, Manufacturer=Yageo, Part Number=RC0805FR-07383RL
R28 R29: library part CMP-2001-04477-2, "RES SMD 5.1K OHM 5% 1/8W 0805", Manufacturer=Yageo, Manufacturer Part Number=AC0805JR-075K1L, Package=AC0805, Power Rating=1/8W, Resistance=5.1KΩ, Temperature="-55°C to +155°C", Temperature Range High=+155°C, Temperature Range Low=-55°C, Tolerance=0.05, Voltage Rating=150V, Automotive=Yes, Automotive Grade="Grade 0", Category=Res, ComponentLink2Description=Datasheet, ComponentLink2URL=http://www.yageo.com/documents/recent/PYu-AC_51_RoHS_L_6.pdf, Composition="Thick Film", Device Class L1="Passive Components", Device Class L2=Resistors, Device Class L3="Chip SMD Resistors", Digikey Description="RES SMD 5.1K OHM 5% 1/8W 0805", Footprint Url=http://www.yageo.com/exep/pages/download/literatures/PYu-R_Mount_10.pdf, Height=0.6mm, Ipc Land Pattern Name=RESC200125X50, Lead Free=Yes, Mouser Description="Thick Film Resistors - SMD 5.1K ohm 5% 1/8W", Octopart=https://octopart.com/ac0805jr-075k1l-yageo-21711115, RoHS=TRUE, Series=AC
R30 R31: library part CMP-2001-01424-1, Manufacturer=Yageo, Part Number=RC0805JR-134K7L
R32: library part CMP-03412-028725-1, "RES SMD 10 OHM 1% 1/8W 0805", Manufacturer=Yageo, Manufacturer Part Number=RT0805FRE0710RL, Package=RT0805, Power Rating=0.125W, Resistance=10Ω, Temperature="-55°C to +155°C", Temperature Coefficient="50 ppm/°C", Temperature Range High=+155°C, Temperature Range Low=-55°C, Tolerance=0.0001, Voltage Rating=150V, Automotive=No, Category=Res, ComponentLink2Description=Datasheet, ComponentLink2URL=http://www.yageo.com/documents/recent/PYu-RT_1-to-0.01_RoHS_L_9.pdf, Composition="Thin Film", Device Class L1="Passive Components", Device Class L2=Resistors, Device Class L3="Chip SMD Resistors", Digikey Description="RES SMD 10 OHM 1% 1/8W 0805", Footprint Url=http://www.yageo.com/exep/pages/download/literatures/PYu-R_Mount_10.pdf, Height=0.6mm, Ipc Land Pattern Name=RESC200125X50, Lead Free=Yes, Mouser Description="High Precision-High Stability Chip Resistor Thin Film 0805 10Ohm 1% Paper T/R", Octopart=https://octopart.com/rt0805fre0710rl-yageo-39855890, RoHS=TRUE, Series=RT
S1: "Switch", Manufacturer_Name="Nidec Copal", Mouser Part Number=229-CFS-0102TA, Datasheet Link=https://www.mouser.at/datasheet/2/972/cfs-1628139.pdf, Height=4.5mm, Manufacturer_Part_Number=CFS-0102TA, Mouser Price/Stock=https://www.mouser.co.uk/ProductDetail/Nidec-Components/CFS-0102TA?qs=XeJtXLiO41Qa%2Fz7Gp%252BxLVg%3D%3D
SW1: library part CMP-03913-134708203-4, "Tactile Switch, 0.05A, 32Vdc, Smd, 300Gf Rohs Compliant: Yes", Current Rating=50mA, Insulation Resistance=1GΩ, Manufacturer Lifecycle Status=ACTIVE, Max Operating Temperature=125°C, Min Operating Temperature=-55°C, Voltage Rating=32V, Contact Plating=Silver, Height=1.9mm, Lifecycle Status=Production, Packaging="Tape and Reel", RoHS=Compliant, YEOL="1 = Estimated lifetime > 10 years"